# Altium PCB pcb.PcbDoc
Units mm, origin at the board's own origin, x right, y up, seen from the top; angles counter-clockwise.
Board outline 52 x 50 mm, 4 copper layers (Top Layer, MID1, MID2, Bottom Layer), stack 1.579 mm thick; 107 components, 61 nets, 347 pads, 88 vias.
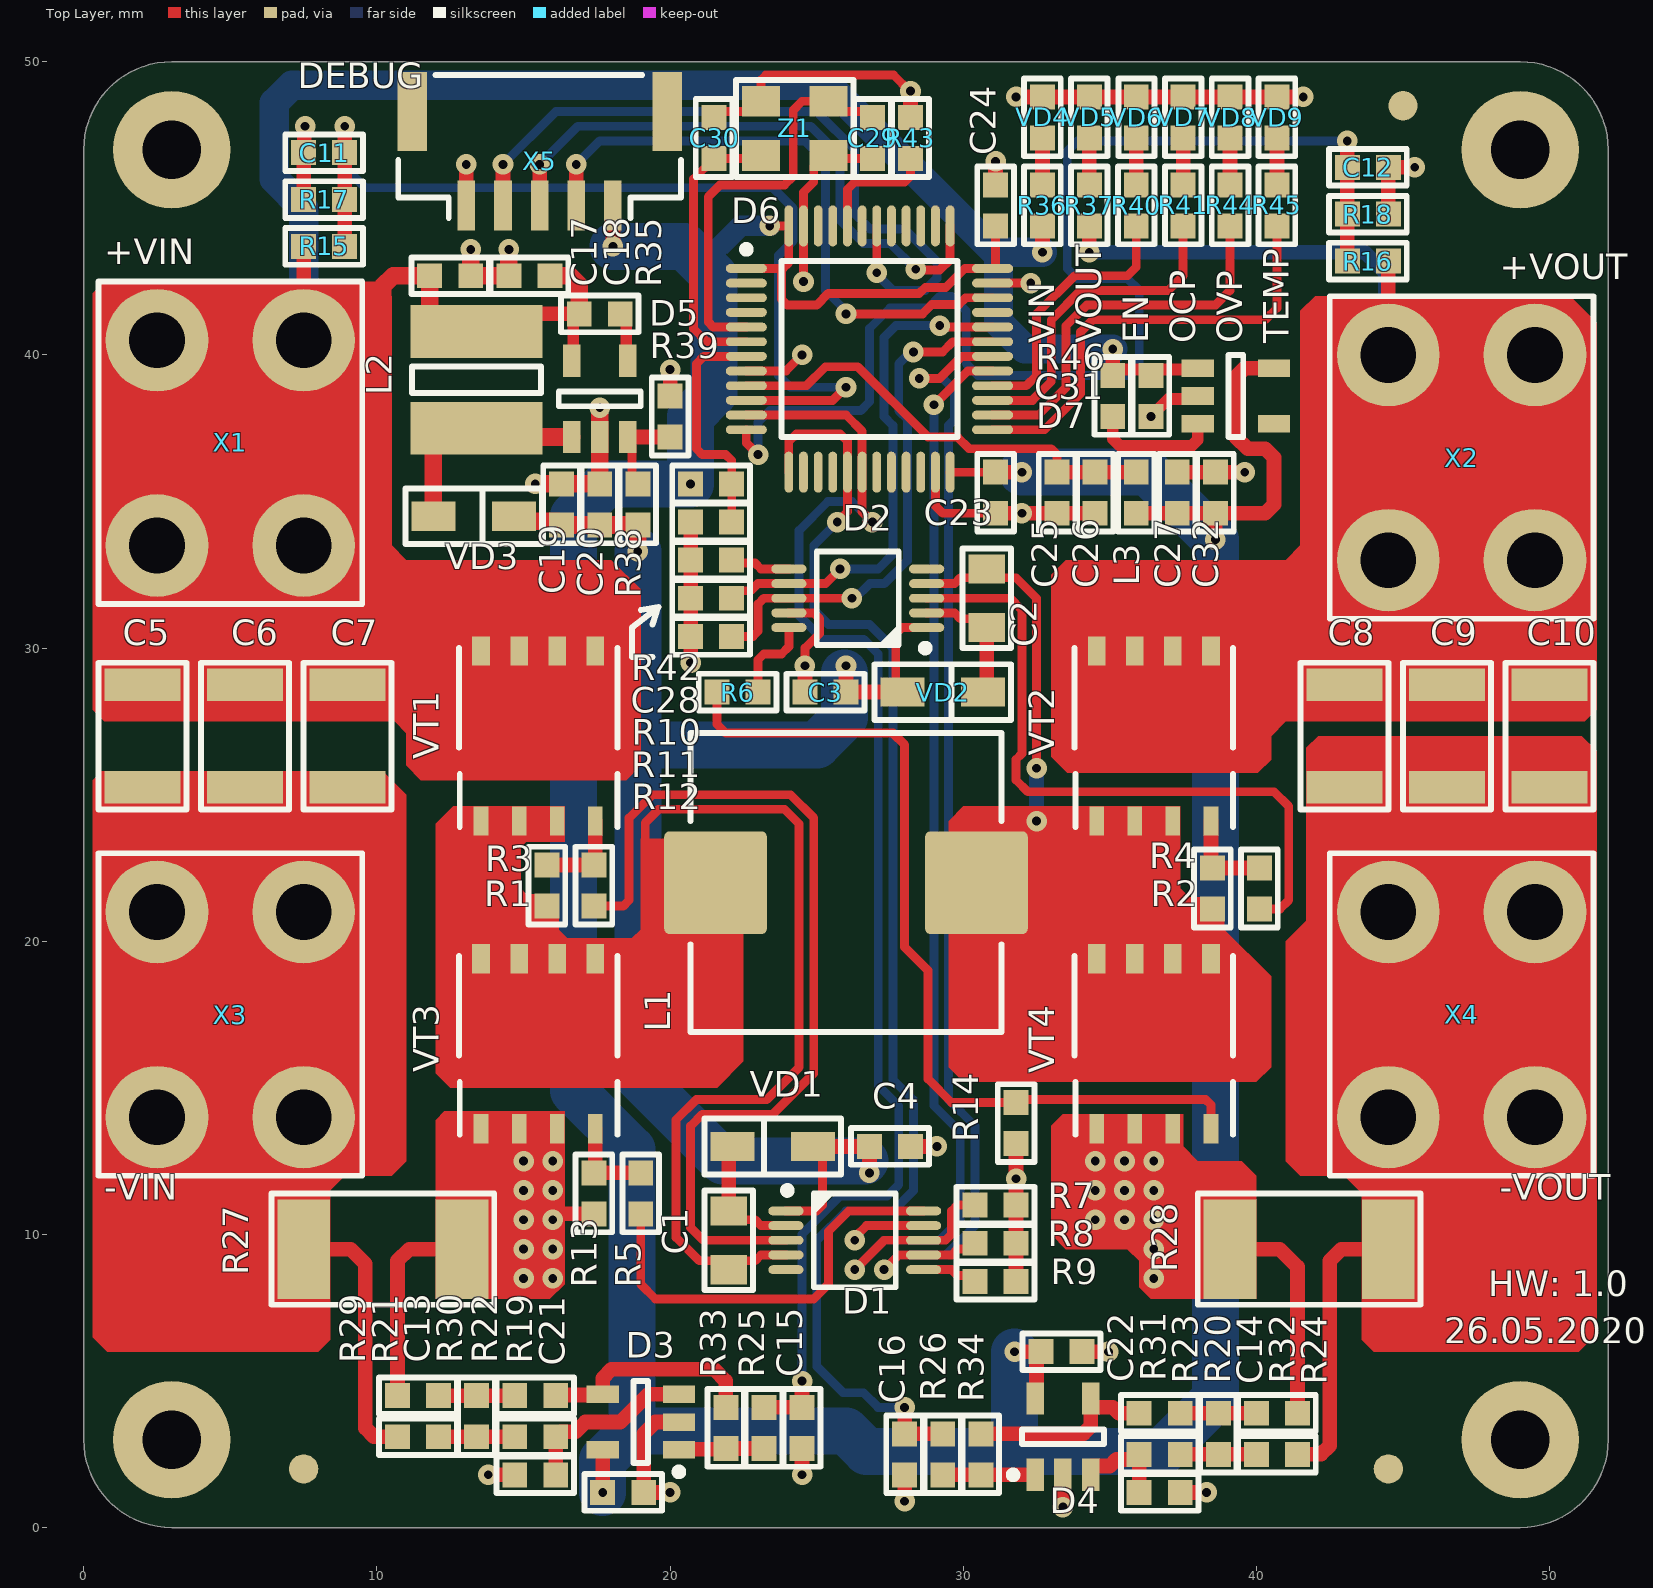
[diagram p0: Top Layer view]
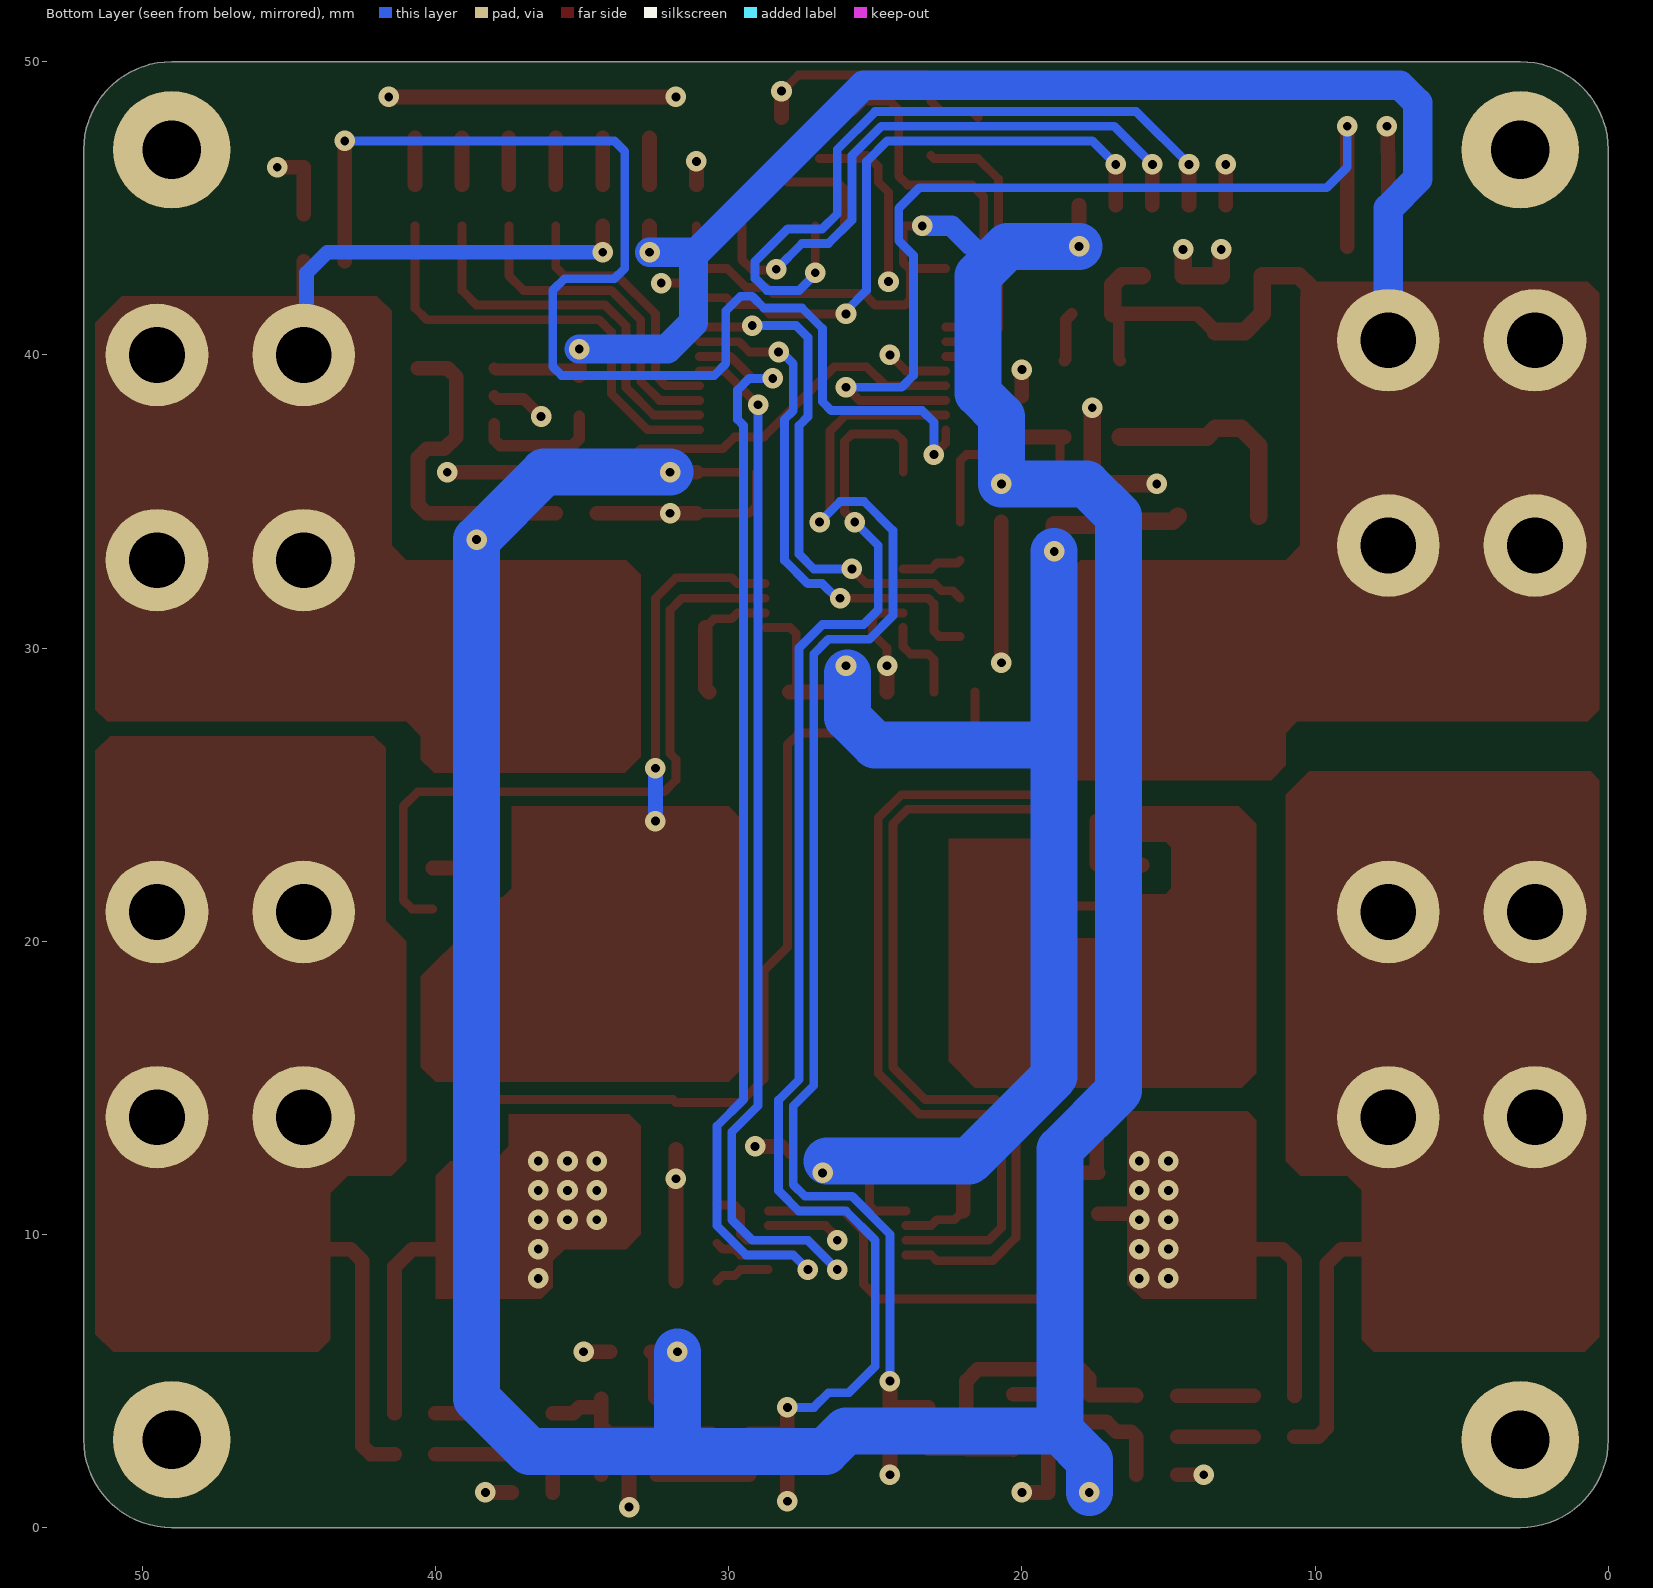
[diagram p1: Bottom Layer view, seen from below]
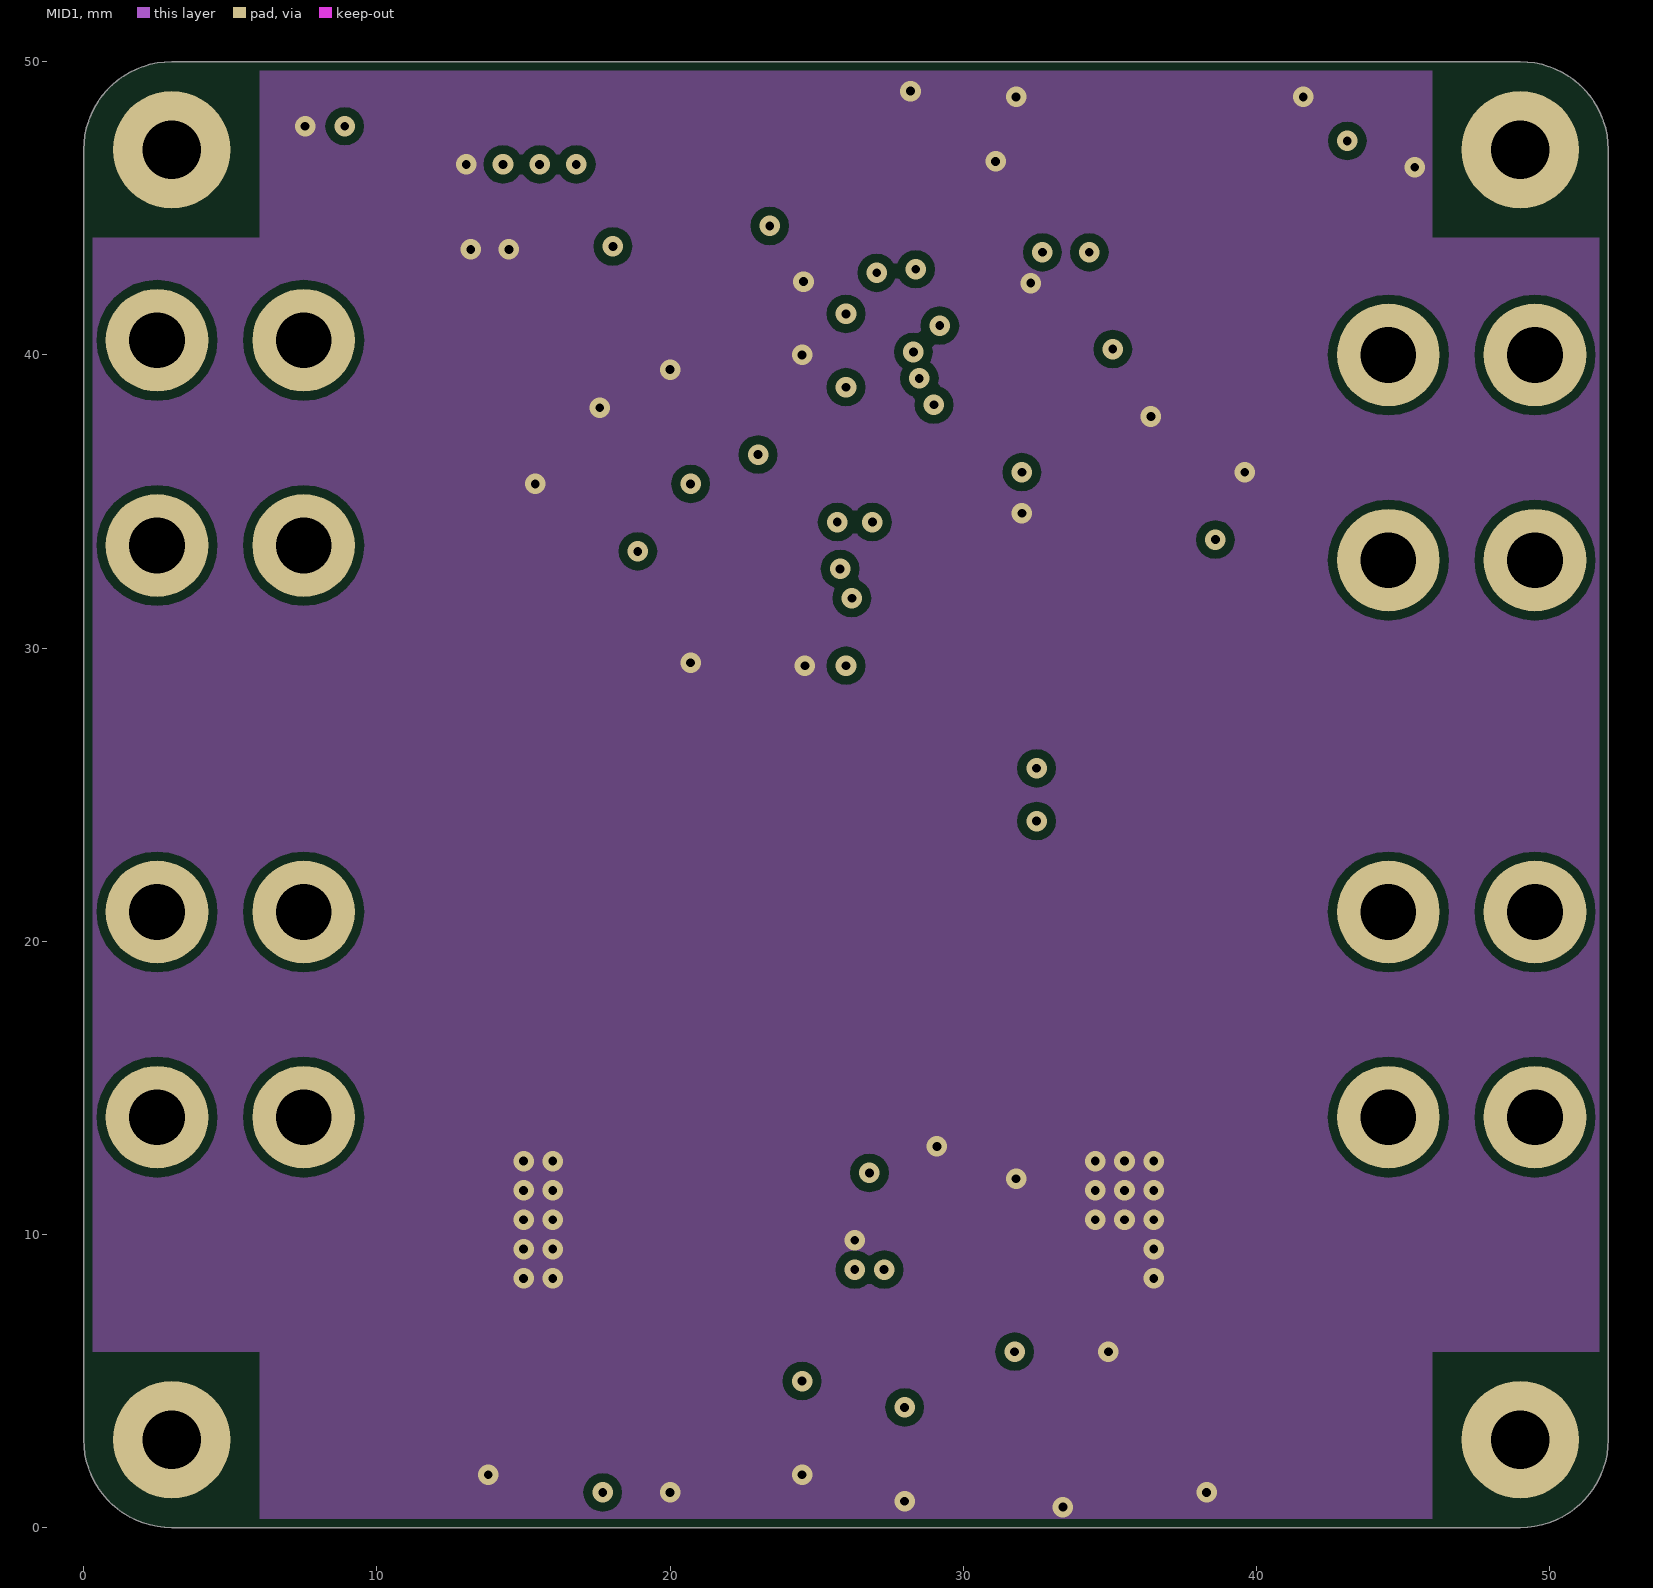
[diagram p2: MID1]
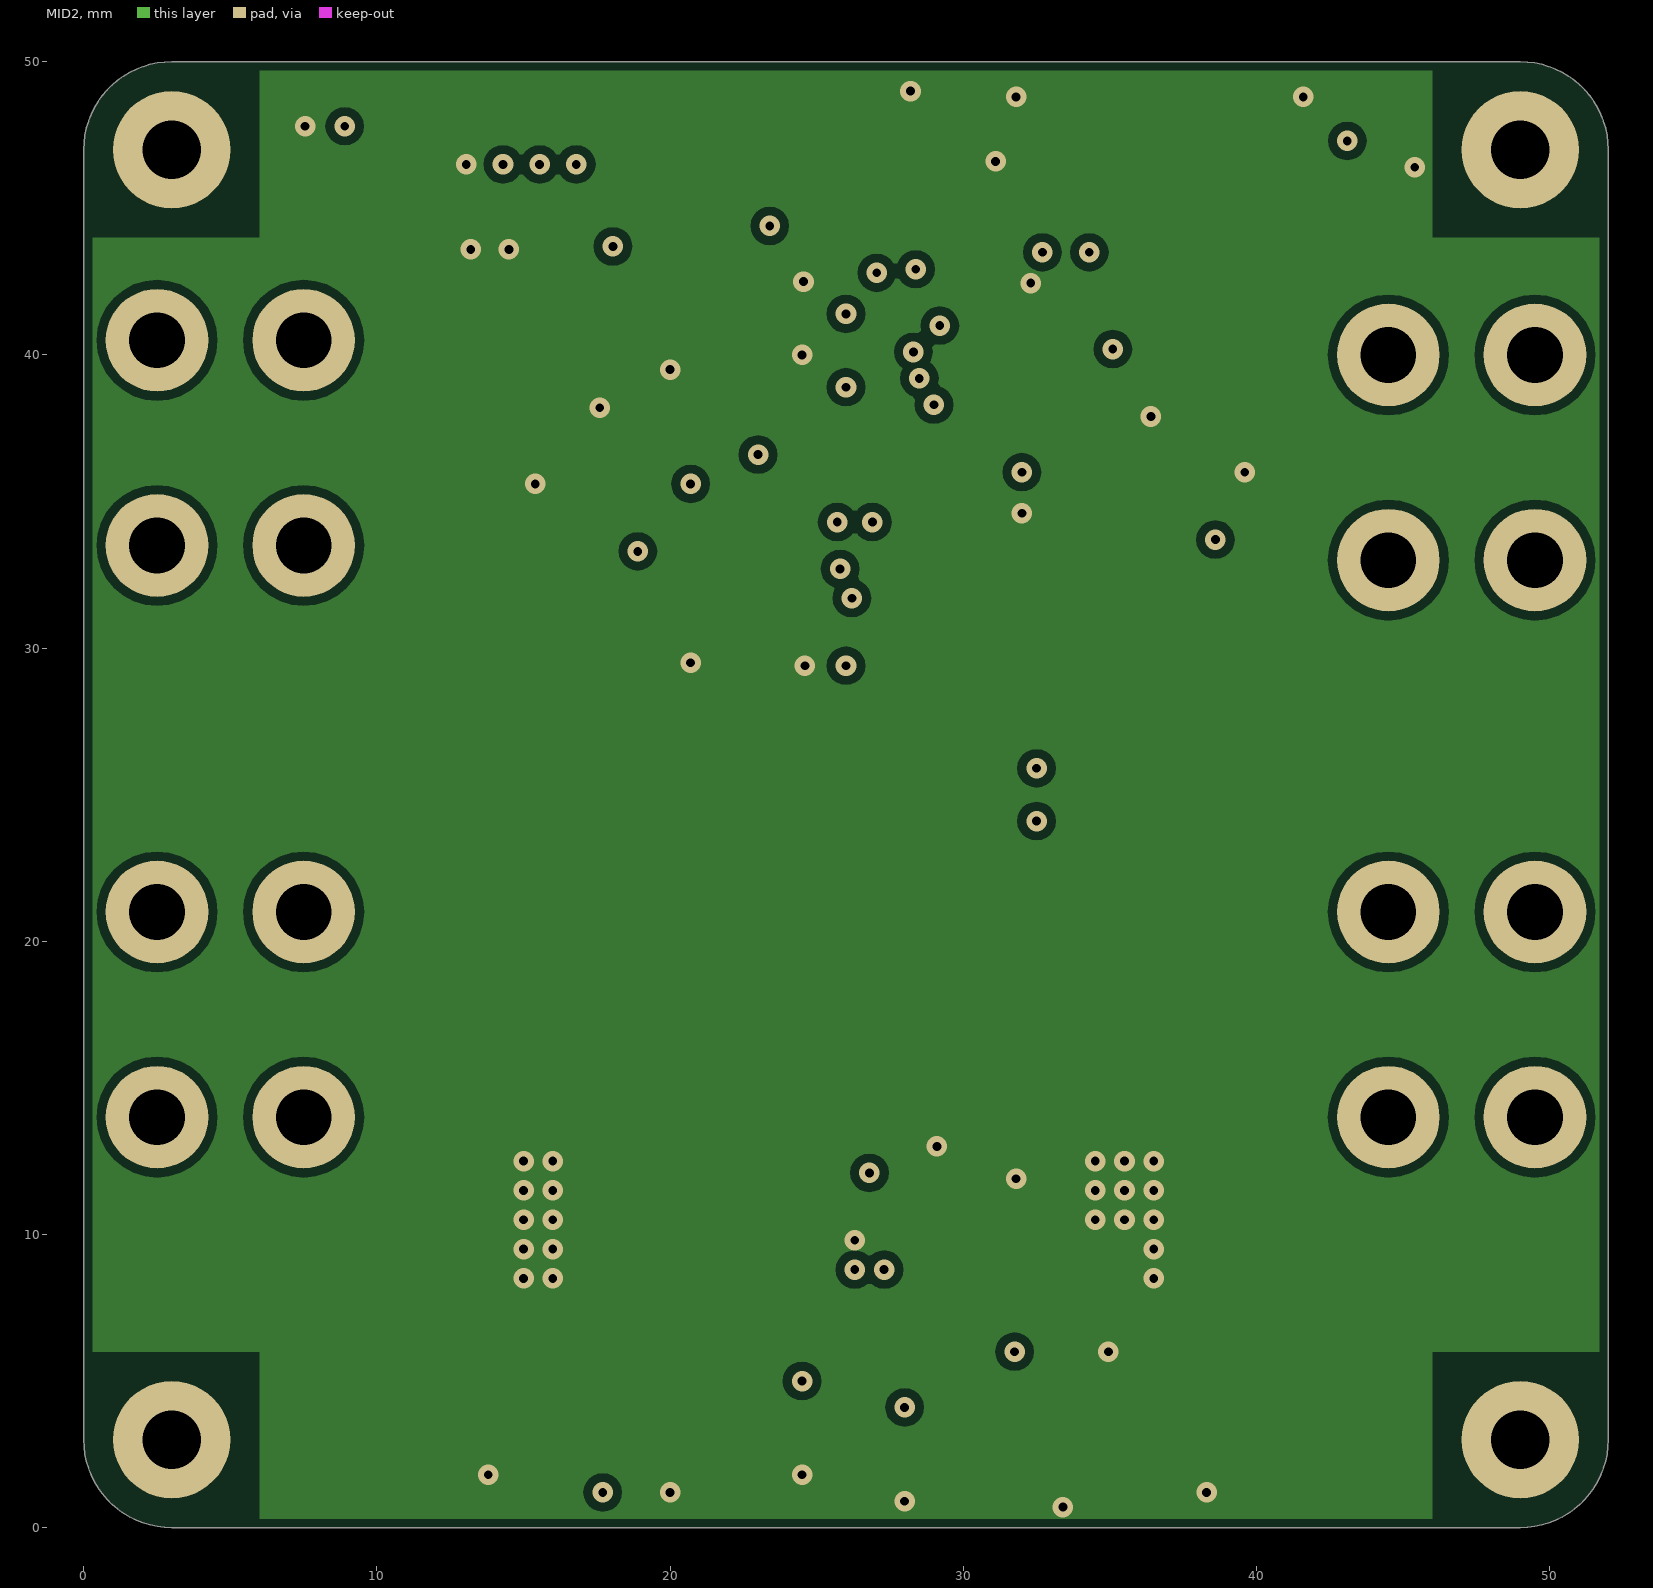
[diagram p3: MID2]
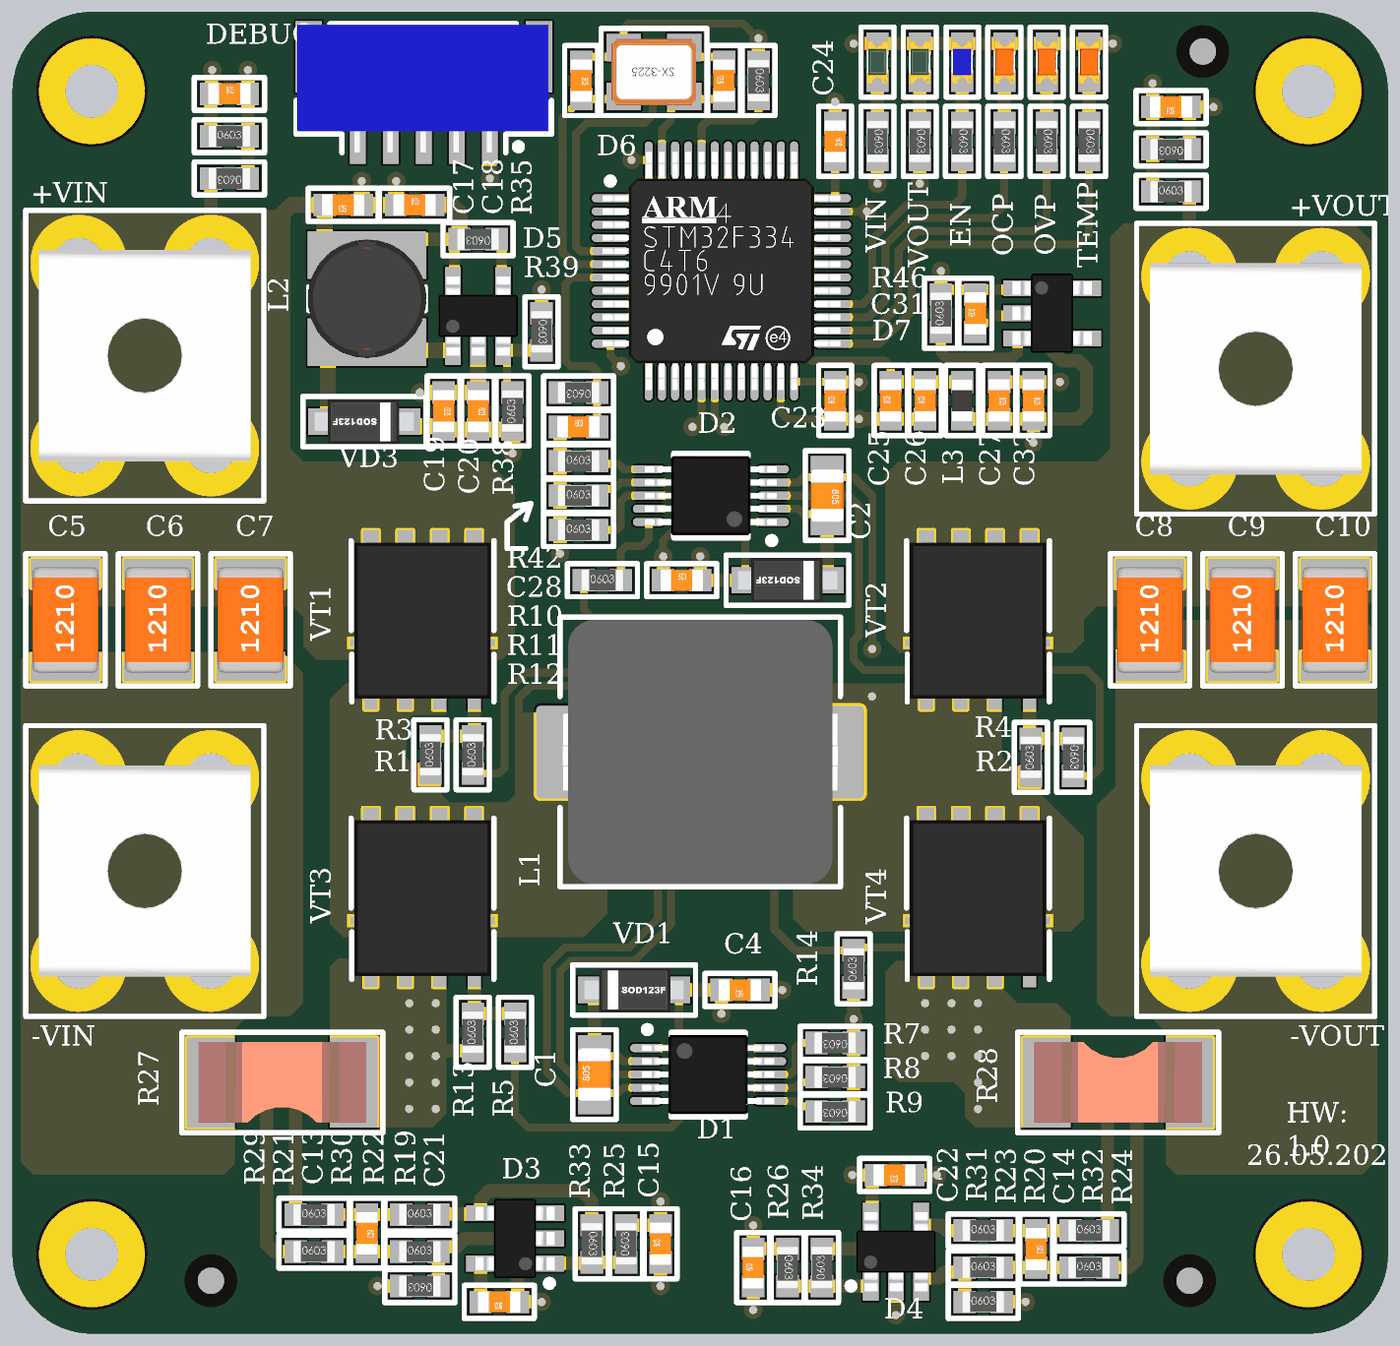
[diagram p4: 3D render of the assembled board from above, using the file's embedded part models]

## Layer stack, top to bottom
Top Solder: solder mask 0.0102, Solder Resist, Dk 3.5
Top Layer: signal copper 0.036
Dielectric 2: prepreg 0.0711, PP-006, Dk 4.1
MID1: signal copper 0.035
Dielectric 1: dielectric 1.295, FR-4, Dk 4.8
MID2: signal copper 0.035
Dielectric 3: prepreg 0.0711, PP-006, Dk 4.1
Bottom Layer: signal copper 0.036
Bottom Solder: solder mask 0.0102, Solder Resist, Dk 3.5

## Board outline
0,3 0,47 cw(c3,47) 3,50 49,50 cw(c49,47) 52,47 52,3 cw(c49,3) 49,0 3,0 cw(c3,3)

## Design rules (kind name [scope] priority, off if disabled: settings)
BoardOutlineClearance [All] p1: gap=0.3 ignorepadtopadclearanceinfootprint=FALSE
Clearance Clearance_MultiLayerPad [OnLayer('Multi-Layer') and IsPad] p1: gap=0.3 ignorepadtopadclearanceinfootprint=FALSE except(0: Arc-Hole Track-Hole SMDPad-Hole THPad-Hole Via-Hole Fill-Hole Poly-Hole Region-Hole Text-Hole)
Clearance Clearance_Polygon [InPolygon] p2: gap=0.2 ignorepadtopadclearanceinfootprint=FALSE except(0: Arc-Hole Track-Hole SMDPad-Hole THPad-Hole Via-Hole Fill-Hole Poly-Hole Region-Hole Text-Hole; 0.3: Arc-Poly Arc-Region Track-Poly Track-Region SMDPad-Poly SMDPad-Region THPad-Poly THPad-Region Via-Poly Via-Region Fill-Poly Fill-Region Poly-Poly Poly-Region Region-Region)
Clearance [All] p3: gap=0.2 ignorepadtopadclearanceinfootprint=FALSE except(0: Arc-Hole Track-Hole SMDPad-Hole THPad-Hole Via-Hole Fill-Hole Poly-Hole Region-Hole Text-Hole)
ComponentClearance [All] p1: gap=0.2 collisioncheckmode=3 verticalgap=0.2 showdistances=FALSE
DiffPairsRouting [All] p1: maxlimit=0.4 minlimit=0.2 mostfreqgap=0.2 toplayer_minwidth=0.2 toplayer_maxwidth=0.3 toplayer_prefwidth=0.2 midlayer1_minwidth=0.2 midlayer1_maxwidth=0.3 midlayer1_prefwidth=0.2 midlayer2_minwidth=0.2 midlayer2_maxwidth=0.3 midlayer2_prefwidth=0.2 bottomlayer_minwidth=0.2 bottomlayer_maxwidth=0.3 bottomlayer_prefwidth=0.2 maxuncoupledlength=12.7
Height [All] p1: minheight=0 maxheight=50 prefheight=12.7
HoleSize [All] p1: absolutevalues=TRUE maxlimit=10 minlimit=0.2 maxpercent=80.000 minpercent=20.000
HoleToHoleClearance [All] p1: gap=0.3 allowstackedmicrovias=TRUE
MinimumSolderMaskSliver [All] p1: minsoldermaskwidth=0.05
PlaneClearance [All] p1: clearance=0.5
PlaneConnect [All] p1: planeconnectstyle=Relief reliefexpansion=0.5 reliefentries=4 reliefconductorwidth=0.5 reliefairgap=0.3
PolygonConnect PolygonConnect_PadGND [InNet('GND') and IsPad] p1: connectstyle=Relief reliefconductorwidth=0.5 reliefentries=4 polygonreliefangle="90 Angle" airgapwidth=0.3
PolygonConnect PolygonConnect_Via [IsVia] p2: connectstyle=Direct reliefconductorwidth=0.254 reliefentries=4 polygonreliefangle="90 Angle" airgapwidth=0.254
PolygonConnect [All] p3: connectstyle=Relief reliefconductorwidth=0.5 reliefentries=4 polygonreliefangle="90 Angle" airgapwidth=0.3
RoutingTopology [All] p1: topology=Vertical
RoutingVias [All] p1: holewidth=0.2 width=0.4 viastyle="Through Hole" minholewidth=0.2 minwidth=0.4 maxholewidth=0.5 maxwidth=1.2
SilkToSilkClearance [All] p1: silktosilkclearance=0.05
SilkToSolderMaskClearance [IsPad] p1: minsilkscreentomaskgap=0.05 clearancetoexposedcopper=TRUE
SolderMaskExpansion [All] p1: expansion=0.075 istentingtop=FALSE
Width [All] p1: maxlimit=10 minlimit=0.2 preferedwidth=0.2
19 further rules are at their usual default settings.

## Classes and differential pairs
component class dsp: C23 C24 C25 C26 C27 C28 C29 C30 C31 C32 D6 D7 L3 R40 R41 R42 R43 R44 R45 R46 VD6 VD7 VD8 VD9 X5 Z1
component class converter: C1 C2 C3 C4 C5 C6 C7 C8 C9 C10 C11 C12 C13 C14 C15 C16 C17 C18 C19 C20 C21 C22 D1 D2 D3 D4 D5 L1 L2 R1 R2 R3 R4 R5 R6 R7 R8 R9 R10 R11 R12 R13 R14 R15 R16 R17 R18 R19 R20 R21 R22 R23 R24 R25 R26 R27 R28 R29 R30 R31 R32 R33 R34 R35 R36 R37 R38 R39 VD1 VD2 VD3 VD4 VD5 VT1 VT2 VT3 VT4 X1 X2 X3 X4

## Components (designator, comment, footprint, x,y, rotation, side; value= is the part's Value field where it differs from the comment)
C1 "Ceramic capacitor, 0.47μF, X7R, ±10%, 25V, 805, -55...+125°C" "CAP: 0805" 22,9.8 r90 top value=0.47μF
C2 "Ceramic capacitor, 0.47μF, X7R, ±10%, 25V, 805, -55...+125°C" "CAP: 0805" 30.8,31.7 r270 top value=0.47μF
C3 "Ceramic capacitor, 1μF, X7R, ±10%, 25V, 603, -55...+125°C" "CAP: 0603" 25.3,28.5 r0 top value=1μF
C4 "Ceramic capacitor, 1μF, X7R, ±10%, 25V, 603, -55...+125°C" "CAP: 0603" 27.5,13 r180 top value=1μF
C5 "Ceramic capacitor, 10μF, X7R, ±10%, 25V, 1210, -55...+125°C" "CAP: 1210" 2,27 r90 top value=10μF
C6 "Ceramic capacitor, 10μF, X7R, ±10%, 25V, 1210, -55...+125°C" "CAP: 1210" 5.5,27 r90 top value=10μF
C7 "Ceramic capacitor, 10μF, X7R, ±10%, 25V, 1210, -55...+125°C" "CAP: 1210" 9,27 r90 top value=10μF
C8 "Ceramic capacitor, 10μF, X7R, ±10%, 25V, 1210, -55...+125°C" "CAP: 1210" 43,27 r90 top value=10μF
C9 "Ceramic capacitor, 10μF, X7R, ±10%, 25V, 1210, -55...+125°C" "CAP: 1210" 46.5,27 r90 top value=10μF
C10 "Ceramic capacitor, 10μF, X7R, ±10%, 25V, 1210, -55...+125°C" "CAP: 1210" 50,27 r90 top value=10μF
C11 "Ceramic capacitor, 0.01μF, X7R, ±10%, 50V, 603, -55...+125°C" "CAP: 0603" 8.2,46.9 r0 top value=0.01μF
C12 "Ceramic capacitor, 0.01μF, X7R, ±10%, 50V, 603, -55...+125°C" "CAP: 0603" 43.8,46.4 r180 top value=0.01μF
C13 "Ceramic capacitor, 470pF, NPO, ±5%, 50V, 603, -55...+125°C" "CAP: 0603" 13.4,3.8 r270 top value=470pF
C14 "Ceramic capacitor, 470pF, NPO, ±5%, 50V, 603, -55...+125°C" "CAP: 0603" 38.7,3.2 r270 top value=470pF
C15 "Ceramic capacitor, 0.01μF, X7R, ±10%, 50V, 603, -55...+125°C" "CAP: 0603" 24.5,3.4 r90 top value=0.01μF
C16 "Ceramic capacitor, 0.01μF, X7R, ±10%, 50V, 603, -55...+125°C" "CAP: 0603" 28,2.5 r90 top value=0.01μF
C17 "Ceramic capacitor, 1μF, X7R, ±10%, 25V, 603, -55...+125°C" "CAP: 0603" 12.5,42.7 r180 top value=1μF
C18 "Ceramic capacitor, 1μF, X7R, ±10%, 25V, 603, -55...+125°C" "CAP: 0603" 15.2,42.7 r0 top value=1μF
C19 "Ceramic capacitor, 1μF, X7R, ±10%, 25V, 603, -55...+125°C" "CAP: 0603" 16.3,34.9 r270 top value=1μF
C20 "Ceramic capacitor, 1μF, X7R, ±10%, 25V, 603, -55...+125°C" "CAP: 0603" 17.6,34.9 r270 top value=1μF
C21 "Ceramic capacitor, 0.1μF, X7R, ±10%, 50V, 603, -55...+125°C" "CAP: 0603" 18.4,1.2 r180 top value=0.1μF
C22 "Ceramic capacitor, 0.1μF, X7R, ±10%, 50V, 603, -55...+125°C" "CAP: 0603" 33.35,6 r180 top value=0.1μF
C23 "Ceramic capacitor, 0.1μF, X7R, ±10%, 50V, 603, -55...+125°C" "CAP: 0603" 31.1,35.3 r90 top value=0.1μF
C24 "Ceramic capacitor, 0.1μF, X7R, ±10%, 50V, 603, -55...+125°C" "CAP: 0603" 31.1,45.1 r270 top value=0.1μF
C25 "Ceramic capacitor, 0.01μF, X7R, ±10%, 50V, 603, -55...+125°C" "CAP: 0603" 33.199,35.3 r90 top value=0.01μF
C26 "Ceramic capacitor, 1μF, X7R, ±10%, 25V, 603, -55...+125°C" "CAP: 0603" 34.5,35.3 r90 top value=1μF
C27 "Ceramic capacitor, 1μF, X7R, ±10%, 25V, 603, -55...+125°C" "CAP: 0603" 37.3,35.3 r270 top value=1μF
C28 "Ceramic capacitor, 0.1μF, X7R, ±10%, 50V, 603, -55...+125°C" "CAP: 0603" 21.4,34.3 r0 top value=0.1μF
C29 "Ceramic capacitor, 12pF, NPO, ±10%, 50V, 603, -55...+125°C" "CAP: 0603" 26.9,47.4 r90 top value=12pF
C30 "Ceramic capacitor, 12pF, NPO, ±10%, 50V, 603, -55...+125°C" "CAP: 0603" 21.5,47.4 r270 top value=12pF
C31 "Ceramic capacitor, 0.1μF, X7R, ±10%, 50V, 603, -55...+125°C" "CAP: 0603" 36.4,38.6 r90 top value=0.1μF
C32 "Ceramic capacitor, 0.1μF, X7R, ±10%, 50V, 603, -55...+125°C" "CAP: 0603" 38.6,35.3 r270 top value=0.1μF
D1 "Half-bridge gate driver, 40V, +1.2A/-1.8A, Complementary, supply 3...21V, -40...+125°C, 10-MSOP" 10-TSSOP 26.299,9.8 r0 top
D2 "Half-bridge gate driver, 40V, +1.2A/-1.8A, Complementary, supply 3...21V, -40...+125°C, 10-MSOP" 10-TSSOP 26.401,31.7 r180 top
D3 "IC op amplifier, Rail-to-Rail, 20 MHz, 2.7...5.5V, -40...+125°C, SOT23-5" SOT23-5 19,3.6 r180 top
D4 "IC op amplifier, Rail-to-Rail, 20 MHz, 2.7...5.5V, -40...+125°C, SOT23-5" SOT23-5 33.4,3.1 r90 top
D5 "DC/DC boost converter, input 2.6...16V, 1.5MHz, output 3...29V, 0.5A, -40...+85°C, SOT23-5" SOT23-5 17.6,38.499 r90 top
D6 "IC microcontroller, 32-Bit, Cortex-M4, 72MHz, 16KB, 12KB, 2...3.6V, -40...+85°C, 48-LQFP" 48-LQFP 26.8,40.2 r0 top locked
D7 "Linear voltage regulator, input 4...24V, 0.5V, output 3.3V, 0.15A, -40...+85°C, SOT23-6" SOT23-5 39.3,38.6 r0 top
L1 "Fixed inductor, 10μH, ±20%, SRP1038C, 8.5A, -40...+125°C" "IND: SRP1038C" 26,22 r180 top value=10μH
L2 "Fixed inductor, 10μH, ±20%, SDR0403, 1.15A, -40...+125°C" "IND: SDR0403" 13.4,37.5 r180 top value=10μH
L3 "Fixed inductor, 10μH, ±20%, 603, 50mA, -55...+125°C" "IND: 0603" 35.9,35.3 r90 top value=10μH
R1 "Resistor film, 10R, ±5%, 603, 0.1W, -55...+125°C" "RES: 0603" 17.4,21.9 r90 top value=10R
R2 "Resistor film, 10R, ±5%, 603, 0.1W, -55...+125°C" "RES: 0603" 40.1,21.8 r270 top value=10R
R3 "Resistor film, 10k, ±5%, 603, 0.1W, -55...+125°C" "RES: 0603" 15.8,21.9 r90 top value=10k
R4 "Resistor film, 10k, ±5%, 603, 0.1W, -55...+125°C" "RES: 0603" 38.5,21.8 r90 top value=10k
R5 "Resistor film, 10R, ±5%, 603, 0.1W, -55...+125°C" "RES: 0603" 19,11.4 r90 top value=10R
R6 "Resistor film, 10R, ±5%, 603, 0.1W, -55...+125°C" "RES: 0603" 22.3,28.5 r0 top value=10R
R7 "Resistor film, 10k, ±5%, 603, 0.1W, -55...+125°C" "RES: 0603" 31.1,11 r180 top value=10k
R8 "Resistor film, 10k, ±5%, 603, 0.1W, -55...+125°C" "RES: 0603" 31.1,9.7 r180 top value=10k
R9 "Resistor film, 10k, ±5%, 603, 0.1W, -55...+125°C" "RES: 0603" 31.1,8.4 r180 top value=10k
R10 "Resistor film, 10k, ±5%, 603, 0.1W, -55...+125°C" "RES: 0603" 21.4,33 r0 top value=10k
R11 "Resistor film, 10k, ±5%, 603, 0.1W, -55...+125°C" "RES: 0603" 21.4,31.7 r0 top value=10k
R12 "Resistor film, 10k, ±5%, 603, 0.1W, -55...+125°C" "RES: 0603" 21.4,30.4 r0 top value=10k
R13 "Resistor film, 10k, ±5%, 603, 0.1W, -55...+125°C" "RES: 0603" 17.4,11.4 r90 top value=10k
R14 "Resistor film, 10k, ±5%, 603, 0.1W, -55...+125°C" "RES: 0603" 31.8,13.8 r90 top value=10k
R15 "Resistor film, 39k, ±1%, 603, 0.1W, -55...+125°C" "RES: 0603" 8.2,43.7 r180 top value=39k
R16 "Resistor film, 39k, ±1%, 603, 0.1W, -55...+125°C" "RES: 0603" 43.8,43.2 r0 top value=39k
R17 "Resistor film, 10k, ±1%, 603, 0.1W, -55...+125°C" "RES: 0603" 8.2,45.3 r0 top value=10k
R18 "Resistor film, 10k, ±1%, 603, 0.1W, -55...+125°C" "RES: 0603" 43.8,44.8 r180 top value=10k
R19 "Resistor film, 20k, ±1%, 603, 0.1W, -55...+125°C" "RES: 0603" 15.4,1.8 r180 top value=20k
R20 "Resistor film, 20k, ±1%, 603, 0.1W, -55...+125°C" "RES: 0603" 36.7,1.2 r0 top value=20k
R21 "Resistor film, 1k, ±1%, 603, 0.1W, -55...+125°C" "RES: 0603" 11.4,3.1 r0 top value=1k
R22 "Resistor film, 1k, ±1%, 603, 0.1W, -55...+125°C" "RES: 0603" 15.4,3.1 r0 top value=1k
R23 "Resistor film, 1k, ±1%, 603, 0.1W, -55...+125°C" "RES: 0603" 36.7,2.5 r0 top value=1k
R24 "Resistor film, 1k, ±1%, 603, 0.1W, -55...+125°C" "RES: 0603" 40.7,2.5 r0 top value=1k
R25 "Resistor film, 120R, ±5%, 603, 0.1W, -55...+125°C" "RES: 0603" 23.2,3.4 r90 top value=120R
R26 "Resistor film, 120R, ±5%, 603, 0.1W, -55...+125°C" "RES: 0603" 29.3,2.5 r270 top value=120R
R27 "Resistor film, 0R05, ±1%, 2512, 3W, -55...+170°C" "RES: CSS2H (2512)" 10.2,9.5 r180 top value=0R05
R28 "Resistor film, 0R05, ±1%, 2512, 3W, -55...+170°C" "RES: CSS2H (2512)" 41.8,9.5 r0 top value=0R05
R29 "Resistor film, 1k, ±1%, 603, 0.1W, -55...+125°C" "RES: 0603" 11.4,4.5 r0 top value=1k
R30 "Resistor film, 1k, ±1%, 603, 0.1W, -55...+125°C" "RES: 0603" 15.4,4.5 r0 top value=1k
R31 "Resistor film, 1k, ±1%, 603, 0.1W, -55...+125°C" "RES: 0603" 36.7,3.9 r0 top value=1k
R32 "Resistor film, 1k, ±1%, 603, 0.1W, -55...+125°C" "RES: 0603" 40.7,3.9 r0 top value=1k
R33 "Resistor film, 20k, ±1%, 603, 0.1W, -55...+125°C" "RES: 0603" 21.9,3.4 r270 top value=20k
R34 "Resistor film, 20k, ±1%, 603, 0.1W, -55...+125°C" "RES: 0603" 30.6,2.5 r90 top value=20k
R35 "Resistor film, 10k, ±5%, 603, 0.1W, -55...+125°C" "RES: 0603" 17.6,41.4 r180 top value=10k
R36 "Resistor film, 1k, ±1%, 603, 0.1W, -55...+125°C" "RES: 0603" 32.7,45.1 r270 top value=1k
R37 "Resistor film, 1k, ±1%, 603, 0.1W, -55...+125°C" "RES: 0603" 34.3,45.1 r270 top value=1k
R38 "Resistor film, 110k, ±1%, 603, 0.1W, -55...+125°C" "RES: 0603" 18.9,34.9 r90 top value=110k
R39 "Resistor film, 10k, ±1%, 603, 0.1W, -55...+125°C" "RES: 0603" 20,37.9 r270 top value=10k
R40 "Resistor film, 1k, ±1%, 603, 0.1W, -55...+125°C" "RES: 0603" 35.9,45.1 r270 top value=1k
R41 "Resistor film, 1k, ±1%, 603, 0.1W, -55...+125°C" "RES: 0603" 37.5,45.1 r270 top value=1k
R42 "Resistor film, 10k, ±5%, 603, 0.1W, -55...+125°C" "RES: 0603" 21.4,35.6 r180 top value=10k
R43 "Resistor film, 10k, ±5%, 603, 0.1W, -55...+125°C" "RES: 0603" 28.2,47.4 r270 top value=10k
R44 "Resistor film, 1k, ±1%, 603, 0.1W, -55...+125°C" "RES: 0603" 39.1,45.1 r270 top value=1k
R45 "Resistor film, 1k, ±1%, 603, 0.1W, -55...+125°C" "RES: 0603" 40.7,45.1 r270 top value=1k
R46 "Resistor film, 10k, ±5%, 603, 0.1W, -55...+125°C" "RES: 0603" 35.1,38.6 r90 top value=10k
VD1 "Schottky diode, 60B160S1F-7, 1A, 650mV, 45pF, SOD-123F, -55...+150°C" "DIODE: SOD123F" 23.5,13 r180 top
VD2 "Schottky diode, 60B160S1F-7, 1A, 650mV, 45pF, SOD-123F, -55...+150°C" "DIODE: SOD123F" 29.3,28.5 r0 top
VD3 "Schottky diode, 60B160S1F-7, 1A, 650mV, 45pF, SOD-123F, -55...+150°C" "DIODE: SOD123F" 13.3,34.5 r0 top
VD4 "LED, 20mA, 2V, 603, -55...+150°C" "LED: 0603G" 32.7,48.1 r90 top
VD5 "LED, 20mA, 2V, 603, -55...+150°C" "LED: 0603G" 34.3,48.1 r90 top
VD6 "LED, 20mA, 3.2V, 603, -55...+150°C" "LED: 0603B" 35.9,48.1 r90 top
VD7 "LED, 20 mA, 2V, 603, -55...+150°C" "LED: 0603R" 37.5,48.1 r90 top
VD8 "LED, 20 mA, 2V, 603, -55...+150°C" "LED: 0603R" 39.1,48.1 r90 top
VD9 "LED, 20 mA, 2V, 603, -55...+150°C" "LED: 0603R" 40.7,48.1 r90 top
VT1 "MOSFET N-channel transistor, 30V, 20A, 17nC, 2.5W, 3.7mOhm, 1100pF, 8-TDSON, -55...+150°C" 8-TDSON 15.5,27 r0 top
VT2 "MOSFET N-channel transistor, 30V, 20A, 17nC, 2.5W, 3.7mOhm, 1100pF, 8-TDSON, -55...+150°C" 8-TDSON 36.5,27 r0 top
VT3 "MOSFET N-channel transistor, 30V, 20A, 17nC, 2.5W, 3.7mOhm, 1100pF, 8-TDSON, -55...+150°C" 8-TDSON 15.5,16.5 r0 top
VT4 "MOSFET N-channel transistor, 30V, 20A, 17nC, 2.5W, 3.7mOhm, 1100pF, 8-TDSON, -55...+150°C" 8-TDSON 36.5,16.5 r0 top
X1 "Power connector, 500V, 15A" "CON: 8191" 5,37 r0 top
X2 "Power connector, 500V, 15A" "CON: 8191" 47,36.5 r0 top
X3 "Power connector, 500V, 15A" "CON: 8191" 5,17.5 r0 top
X4 "Power connector, 500V, 15A" "CON: 8191" 47,17.5 r0 top
X5 "Connector, 5pin, 1.25mm, 50VDC, 1A" "CON: SM05B-GHS" 15.525,49.55 r180 top
Z1 "Crystal, 8MHz, 12pF, ±30ppm, case 3225, -40...+85°C" "OSC: 3225" 24.25,47.725 r180 top

## Footprints (in the part's own frame and the unit in brackets; to place one, negate y for a bottom-side part, rotate by r counter-clockwise, add the part's x,y. Pads: shape width x height; smd on the part's side, far side on the other; paste and mask are expansions set on the pad)
8-TDSON [mm] "pitch 1.3 mm, power pad"
  rect 0.5x1 smd: 1(1.95,-2.9) 3(-1.95,-2.9) 3(-0.65,-2.9) 3(0.65,-2.9)
  rect 0.6x1 smd: 2(-1.95,2.9) 2(-0.65,2.9) 2(0.65,2.9) 2(1.95,2.9)
  round 0.5 on Mech1: ""(2.1,-2.4)
  Top Layer region: -2.25,2.525 -1.65,2.525 -0.95,2.525 -0.35,2.525 0.35,2.525 0.95,2.525 1.65,2.525 2.25,2.525 2.25,-0.725 2.75,-0.725 2.75,-1.025 -2.75,-1.025 -2.75,-0.725 -2.25,-0.725
  Top Layer region: -2.75,-1.025 -2.25,-1.025 -2.25,-1.25 2.25,-1.25 2.25,-1.025 2.75,-1.025 2.75,-1.025 2.75,-0.725 -2.75,-0.725
  silkscreen extent -2.7,-3.1 2.7,3, body extent -2.67,-3.1 2.68,3.05, height 1.03
10-TSSOP [mm] "3x3 mm, pitch 0.5 mm"
  rrect100% 1.2x0.3 smd: 1(-2.35,1) 2(-2.35,0.5) 3(-2.35,0) 4(-2.35,-0.5) 5(-2.35,-1) 6(2.35,-1) 7(2.35,-0.5) 8(2.35,0) 9(2.35,0.5) 10(2.35,1)
  round 0.5 on Mech1: ""(-2.1,1.1)
  silkscreen extent -2.42,-1.6 1.4,1.82, body extent -2.5,-1.5 2.5,1.5, height 1.1
48-LQFP [mm] "QFP, 48-Leads, Body 7x7mm, Pitch 0.5mm, IPC Medium Density"
  oval 1.4x0.3 smd: 1(-4.2,2.75) 2(-4.2,2.25) 3(-4.2,1.75) 4(-4.2,1.25) 5(-4.2,0.75) 6(-4.2,0.25) 7(-4.2,-0.25) 8(-4.2,-0.75) 9(-4.2,-1.25) 10(-4.2,-1.75) 11(-4.2,-2.25) 12(-4.2,-2.75) 25(4.2,-2.75) 26(4.2,-2.25) 27(4.2,-1.75) 28(4.2,-1.25) 29(4.2,-0.75) 30(4.2,-0.25) 31(4.2,0.25) 32(4.2,0.75) 33(4.2,1.25) 34(4.2,1.75) 35(4.2,2.25) 36(4.2,2.75)
  oval 0.3x1.4 smd: 13(-2.75,-4.2) 14(-2.25,-4.2) 15(-1.75,-4.2) 16(-1.25,-4.2) 17(-0.75,-4.2) 18(-0.25,-4.2) 19(0.25,-4.2) 20(0.75,-4.2) 21(1.25,-4.2) 22(1.75,-4.2) 23(2.25,-4.2) 24(2.75,-4.2) 37(2.75,4.2) 38(2.25,4.2) 39(1.75,4.2) 40(1.25,4.2) 41(0.75,4.2) 42(0.25,4.2) 43(-0.25,4.2) 44(-0.75,4.2) 45(-1.25,4.2) 46(-1.75,4.2) 47(-2.25,4.2) 48(-2.75,4.2)
  round 0.5 on Mech1: ""(-4,4)
  silkscreen extent -4.32,-3 3,3.52, body extent -4.5,-4.5 4.5,4.5, height 1.6
"CAP: 0603" [mm]
  rect 0.85x0.85 smd: 1(-0.7,0) 2(0.7,0)
  silkscreen extent -1.33,-0.63 1.33,0.63, body extent -0.8,-0.4 0.8,0.4, height 0.3
"CAP: 0805" [mm]
  rect 1x1.25 smd: 1(-1,0) 2(1,0)
  silkscreen extent -1.7,-0.82 1.7,0.82, body extent -1,-0.62 1,0.63, height 0.78
"CAP: 1210" [mm]
  rect 1.1x2.6 smd: 1(-1.75,0) 2(1.75,0)
  silkscreen extent -2.5,-1.5 2.5,1.5, body extent -2,-1.24 2,1.24, height 1.7
"CON: 8191" [mm]
  round 3.5 hole 1.9: 1(-2.5,-3.5) 1(-2.5,3.5) 1(2.5,-3.5) 1(2.5,3.5)
  silkscreen extent -4.5,-5.5 4.5,5.5, body extent -4,-4 4,4, height 7.05
"CON: SM05B-GHS" [mm]
  rect 1x2.7 smd: 0(-4.375,1.25) 0(4.325,1.25)
  rect 0.6x1.7 smd: 1(-2.525,4.45) 2(-1.275,4.45) 3(-0.025,4.45) 4(1.225,4.45) 5(2.475,4.45)
  round 0.5 on Mech1: ""(-4.3,4.45)
  round 0.5 on Top Overlay: ""(-3.6,4.65)
  silkscreen extent -4.85,0 4.8,4.88, body extent -4.75,0.03 4.75,4.88, height 4.35
"DIODE: SOD123F" [mm]
  rect 1.5x1 smd: 1(-1.375,0) 2(1.375,0)
  silkscreen extent -2.32,-0.95 2.32,0.95, body extent -1.87,-0.85 1.88,0.85, height 1.23
"IND: 0603" [mm]
  rect 0.85x0.85 smd: 1(-0.7,0) 2(0.7,0)
  silkscreen extent -1.33,-0.63 1.33,0.63, body extent -0.8,-0.4 0.8,0.4, height 0.8
"IND: SDR0403" [mm]
  rect 4.5x1.8 smd: 1(0,0) 2(0,-3.3)
  silkscreen extent -2.2,-2.1 2.2,-1.2, body extent -2.25,-3.9 2.25,0.6, height 3.5
"IND: SRP1038C" [mm]
  rrect10% 3.5x3.5 smd mask+0.102: 1(-4.45,0) 2(4.45,0)
  silkscreen extent -5.3,-5.1 5.3,5.1, body extent -5.2,-5 5.2,5, height 3.8
"LED: 0603B" [mm]
  rect 0.85x0.85 smd: 1(-0.7,0) 2(0.7,0)
  silkscreen extent -1.33,-0.63 1.33,0.6, body extent -0.8,-0.4 0.8,0.4, height 0.6
"LED: 0603G" [mm]
  rect 0.85x0.85 smd: 1(-0.7,0) 2(0.7,0)
  silkscreen extent -1.33,-0.63 1.33,0.63, body extent -0.8,-0.4 0.8,0.4, height 0.6
"LED: 0603R" [mm]
  rect 0.85x0.85 smd: 1(-0.7,0) 2(0.7,0)
  silkscreen extent -1.33,-0.63 1.33,0.63, body extent -0.8,-0.4 0.8,0.4, height 0.6
"OSC: 3225" [mm]
  rect 1.3x1.05 smd: 1(-1.15,-0.925) 2(1.15,-0.925) 3(1.15,0.925) 4(-1.15,0.925)
  silkscreen extent -2,-1.65 2,1.65, body extent -1.6,-1.25 1.6,1.25, height 0.81
"RES: 0603" [mm]
  rect 0.85x0.85 smd: 1(-0.7,0) 2(0.7,0)
  silkscreen extent -1.33,-0.63 1.33,0.63, body extent -0.8,-0.4 0.8,0.4, height 0.44
"RES: CSS2H (2512)" [mm]
  rect 1.8x3.4 smd: 1(-2.7,0) 2(2.7,0)
  silkscreen extent -3.8,-1.9 3.8,1.9, body extent -3.18,-1.53 3.18,1.53, height 0.83
SOT23-5 [mm] "pitch 0.95 mm"
  rect 1.1x0.6 smd: 1(-1.3,0.95) 2(-1.3,0) 3(-1.3,-0.95) 4(1.3,-0.95) 5(1.3,0.95)
  round 0.5 on Mech1: ""(-1.1,1.1)
  silkscreen extent -1.43,-1.4 0.25,1.82, body extent -1.5,-1.5 1.5,1.5, height 1.3

## Part data
C1 C2: library part Ceramic_0805, Manufacturer=Samsung, Package=0805, PartNumber=CL21B474KAFNNNG, Temperature=-55...+125°C, Tolerance=±10%, TypeCapacitor="Ceramic capacitor", TypeDielectric=X7R, Voltage=25V, HelpURL=https://www.digikey.com/product-detail/en/samsung-electro-mechanics/CL21B474KAFNNNG/1276-6480-1-ND/5958108, ValueManufacturerPartNumber="Ceramic capacitor, 0.47μF, X7R, ±10%, 25V, 805, -55...+125°C"
C3 C4 C17 C18 C19 C20 C26 C27: library part Ceramic_0603, Manufacturer=Samsung, Package=0603, PartNumber=CL10B105KA8NNNC, Temperature=-55...+125°C, Tolerance=±10%, TypeCapacitor="Ceramic capacitor", TypeDielectric=X7R, Voltage=25V, HelpURL=https://www.digikey.com/product-detail/en/samsung-electro-mechanics/CL10B105KA8NNNC/1276-1184-1-ND/3889270, ValueManufacturerPartNumber="Ceramic capacitor, 1μF, X7R, ±10%, 25V, 603, -55...+125°C"
C5 C6 C7 C8 C9 C10: library part Ceramic_1210, Manufacturer=Samsung, Package=1210, PartNumber=CL32B106KAJNNNE, Temperature=-55...+125°C, Tolerance=±10%, TypeCapacitor="Ceramic capacitor", TypeDielectric=X7R, Voltage=25V, HelpURL=https://www.digikey.com/product-detail/en/samsung-electro-mechanics/CL32B106KAJNNNE/1276-1807-1-ND/3889893, ValueManufacturerPartNumber="Ceramic capacitor, 10μF, X7R, ±10%, 25V, 1210, -55...+125°C"
C11 C12 C15 C16 C25: library part Ceramic_0603, Manufacturer=Yageo, Package=0603, PartNumber=CL10B103KB8NNNC, Temperature=-55...+125°C, Tolerance=±10%, TypeCapacitor="Ceramic capacitor", TypeDielectric=X7R, Voltage=50V, HelpURL=https://www.digikey.com/product-detail/en/samsung-electro-mechanics/CL10B103KB8NNNC/1276-1009-1-ND/3889095, ValueManufacturerPartNumber="Ceramic capacitor, 0.01μF, X7R, ±10%, 50V, 603, -55...+125°C"
C13 C14: library part Ceramic_0603, Manufacturer=Yageo, Package=0603, PartNumber=CL10C471JB8NNNC, Temperature=-55...+125°C, Tolerance=±5%, TypeCapacitor="Ceramic capacitor", TypeDielectric=NPO, Voltage=50V, HelpURL=https://www.digikey.com/product-detail/en/samsung-electro-mechanics/CL10C471JB8NNNC/1276-1168-1-ND/3889254, ValueManufacturerPartNumber="Ceramic capacitor, 470pF, NPO, ±5%, 50V, 603, -55...+125°C"
C21 C22 C23 C24 C28 C31 C32: library part Ceramic_0603, Manufacturer=Yageo, Package=0603, PartNumber=CL10B104KB8WPND, Temperature=-55...+125°C, Tolerance=±10%, TypeCapacitor="Ceramic capacitor", TypeDielectric=X7R, Voltage=50V, HelpURL=https://www.digikey.com/product-detail/en/samsung-electro-mechanics/CL10B104KB8WPND/1276-CL10B104KB8WPNDCT-ND/11488014, ValueManufacturerPartNumber="Ceramic capacitor, 0.1μF, X7R, ±10%, 50V, 603, -55...+125°C"
C29 C30: library part Ceramic_0603, Manufacturer=Samsung, Package=0603, PartNumber=CL10C120JB8NNNC, Temperature=-55...+125°C, Tolerance=±10%, TypeCapacitor="Ceramic capacitor", TypeDielectric=NPO, Voltage=50V, HelpURL=https://www.digikey.com/product-detail/en/samsung-electro-mechanics/CL10C120JB8NNNC/1276-1254-1-ND/3889340, ValueManufacturerPartNumber="Ceramic capacitor, 12pF, NPO, ±10%, 50V, 603, -55...+125°C"
D1 D2: library part FD2105M, "Gate driver", CurrentOutput=+1.2A/-1.8A, Frequency=40V, Manufacturer="Fortior Tech", Package=10-MSOP, Temperature=-40...+125°C, VoltageSupply="supply 3...21V", CMTI=Complementary, ComponentType="Half-bridge gate driver", HelpURL=https://lcsc.com/product-detail/Others_Fortior-Tech-FD2105M_C328452.html, PartNumber=FD2105M, ValueManufacturerPartNumber="Half-bridge gate driver, 40V, +1.2A/-1.8A, Complementary, supply 3...21V, -40...+125°C, 10-MSOP"
D3 D4: library part TSV991ILT, "OP amplifier", Manufacturer=STMicroelectronics, Package=SOT23-5, Temperature=-40...+125°C, ComponentType="IC op amplifier", GainBandwidth="20 MHz", HelpURL=https://www.digikey.com/product-detail/en/stmicroelectronics/TSV991ILT/497-6001-1-ND/1578484, OutputType=Rail-to-Rail, PartNumber=TSV991ILT, Supply=2.7...5.5V, ValueManufacturerPartNumber="IC op amplifier, Rail-to-Rail, 20 MHz, 2.7...5.5V, -40...+125°C, SOT23-5"
D5: library part AP3012KTR-G1, "Boost converter", CurrentOutput=0.5A, Frequency=1.5MHz, Manufacturer="Diodes Incorporated", Package=SOT23-5, Temperature=-40...+85°C, VoltageInput="input 2.6...16V", VoltageOutput="output 3...29V", ComponentType="DC/DC boost converter", HelpURL=https://www.digikey.com/product-detail/en/diodes-incorporated/AP3012KTR-G1/AP3012KTR-G1DICT-ND/4505297, PartNumber=AP3012KTR-G1, ValueManufacturerPartNumber="DC/DC boost converter, input 2.6...16V, 1.5MHz, output 3...29V, 0.5A, -40...+85°C, SOT23-5"
D6: library part STM32F334C4T6, "Cortex-M4", Manufacturer=STMicroelectronics, Package=48-LQFP, Temperature=-40...+85°C, ComponentType="IC microcontroller", CoreProcessor=Cortex-M4, CoreSize=32-Bit, HelpURL=https://www.digikey.com/products/en?keywords=STM32F334C4T6, MemoryRAM=12KB, MemoryROM=16KB, PartNumber=STM32F334C4T6, Speed=72MHz, Supply=2...3.6V, ValueManufacturerPartNumber="IC microcontroller, 32-Bit, Cortex-M4, 72MHz, 16KB, 12KB, 2...3.6V, -40...+85°C, 48-LQFP"
D7: library part AP2204K-3.3TRG1, "Linear voltage regulator", CurrentOutput=0.15A, Manufacturer="Diodes Incorporated", Package=SOT23-6, Temperature=-40...+85°C, VoltageInput="input 4...24V", VoltageOutput="output 3.3V", ComponentType="Linear voltage regulator", HelpURL=https://www.digikey.com/product-detail/en/diodes-incorporated/AP2204K-3.3TRG1/AP2204K-3.3TRG1DICT-ND/4505288, MaxDropout=0.5V, PartNumber=AP2204K-3.3TRG1, ValueManufacturerPartNumber="Linear voltage regulator, input 4...24V, 0.5V, output 3.3V, 0.15A, -40...+85°C, SOT23-6"
L1: library part Inductor_SRP1038C, Manufacturer=Bourns, MaxCurrent=8.5A, Package=SRP1038C, PartNumber=SRP1038C-100M, Temperature=-40...+125°C, Tolerance=±20%, TypeInductor="Fixed inductor", HelpURL=https://www.digikey.com/product-detail/en/bourns-inc/SRP1038C-100M/SRP1038C-100MCT-ND/10249149, ValueManufacturerPartNumber="Fixed inductor, 10μH, ±20%, SRP1038C, 8.5A, -40...+125°C"
L2: library part Inductor_SDR0403, Manufacturer=Bourns, MaxCurrent=1.15A, Package=SDR0403, PartNumber=SDR0403-100ML, Temperature=-40...+125°C, Tolerance=±20%, TypeInductor="Fixed inductor", HelpURL=https://www.digikey.com/product-detail/en/bourns-inc/SDR0403-100ML/SDR0403-100MLCT-ND/2127080, ValueManufacturerPartNumber="Fixed inductor, 10μH, ±20%, SDR0403, 1.15A, -40...+125°C"
L3: library part Inductor_0603, Manufacturer="Murata Electronics", MaxCurrent=50mA, Package=0603, PartNumber=LQM18FN100M00D, Temperature=-55...+125°C, Tolerance=±20%, TypeInductor="Fixed inductor", HelpURL=https://www.digikey.com/product-detail/en/murata-electronics-north-america/LQM18FN100M00D/490-4025-1-ND/1016285, ValueManufacturerPartNumber="Fixed inductor, 10μH, ±20%, 603, 50mA, -55...+125°C"
R1 R2 R5 R6: library part Resistor_0603, Manufacturer=Yageo, Package=0603, PartNumber=RC0603JR-0710RL, Power=0.1W, Temperature=-55...+125°C, Tolerance=±5%, TypeResistor="Resistor film", HelpURL=https://www.digikey.com/product-detail/en/yageo/RC0603JR-0710RL/311-10GRCT-ND/729646, ValueManufacturerPartNumber="Resistor film, 10R, ±5%, 603, 0.1W, -55...+125°C"
R3 R4 R7 R8 R9 R10 R11 R12 R13 R14 R35 R42 R43 R46: library part Resistor_0603, Manufacturer=Yageo, Package=0603, PartNumber=RC0603JR-0710KL, Power=0.1W, Temperature=-55...+125°C, Tolerance=±5%, TypeResistor="Resistor film", HelpURL=https://www.digikey.com/product-detail/en/yageo/RC0603JR-0710KL/311-10KGRCT-ND/729647, ValueManufacturerPartNumber="Resistor film, 10k, ±5%, 603, 0.1W, -55...+125°C"
R15 R16: library part Resistor_0603, Manufacturer=Yageo, Package=0603, PartNumber=RC0603FR-0739KL, Power=0.1W, Temperature=-55...+125°C, Tolerance=±1%, TypeResistor="Resistor film", HelpURL=https://www.digikey.com/product-detail/en/yageo/RC0603FR-0739KL/311-39-0KHRCT-ND/730142, ValueManufacturerPartNumber="Resistor film, 39k, ±1%, 603, 0.1W, -55...+125°C"
R17 R18 R39: library part Resistor_0603, Manufacturer=Yageo, Package=0603, PartNumber=RC0603FR-0710KL, Power=0.1W, Temperature=-55...+125°C, Tolerance=±1%, TypeResistor="Resistor film", HelpURL=https://www.digikey.com/product-detail/en/yageo/RC0603FR-0710KL/311-10-0KHRCT-ND/729827, ValueManufacturerPartNumber="Resistor film, 10k, ±1%, 603, 0.1W, -55...+125°C"
R19 R20 R33 R34: library part Resistor_0603, Manufacturer=Yageo, Package=0603, PartNumber=RC0603FR-0720KL, Power=0.1W, Temperature=-55...+125°C, Tolerance=±1%, TypeResistor="Resistor film", HelpURL=https://www.digikey.com/product-detail/en/yageo/RC0603FR-0720KL/311-20-0KHRCT-ND/729987, ValueManufacturerPartNumber="Resistor film, 20k, ±1%, 603, 0.1W, -55...+125°C"
R21 R22 R23 R24 R29 R30 R31 R32 R36 R37 R40 R41 R44 R45: library part Resistor_0603, Manufacturer=Yageo, Package=0603, PartNumber=RC0603FR-071KL, Power=0.1W, Temperature=-55...+125°C, Tolerance=±1%, TypeResistor="Resistor film", HelpURL=https://www.digikey.com/product-detail/en/yageo/RC0603FR-071KL/311-1-00KHRCT-ND/729790, ValueManufacturerPartNumber="Resistor film, 1k, ±1%, 603, 0.1W, -55...+125°C"
R25 R26: library part Resistor_0603, Manufacturer=Yageo, Package=0603, PartNumber=RC0603JR-07120RL, Power=0.1W, Temperature=-55...+125°C, Tolerance=±5%, TypeResistor="Resistor film", HelpURL=https://www.digikey.com/product-detail/en/yageo/RC0603JR-07120RL/311-120GRCT-ND/729653, ValueManufacturerPartNumber="Resistor film, 120R, ±5%, 603, 0.1W, -55...+125°C"
R27 R28: library part Shunt, Manufacturer=Bourns, Package=2512, PartNumber=CRA2512-FZ-R050ELF, Power=3W, Temperature=-55...+170°C, Tolerance=±1%, TypeResistor="Resistor film", HelpURL=https://www.digikey.com/product-detail/en/bourns-inc/CRA2512-FZ-R050ELF/CRA2512-FZ-R050ELFCT-ND/1775057, ValueManufacturerPartNumber="Resistor film, 0R05, ±1%, 2512, 3W, -55...+170°C"
R38: library part Resistor_0603, Manufacturer=Yageo, Package=0603, PartNumber=RC0603FR-07110KL, Power=0.1W, Temperature=-55...+125°C, Tolerance=±1%, TypeResistor="Resistor film", HelpURL=https://www.digikey.com/product-detail/en/yageo/RC0603FR-07110KL/311-110KHRCT-ND/729852, ValueManufacturerPartNumber="Resistor film, 110k, ±1%, 603, 0.1W, -55...+125°C"
VD1 VD2 VD3: library part Schottky_single, Current=1A, Manufacturer="Diodes Incorporated", Package=SOD-123F, PartNumber=B160S1F-7, Temperature=-55...+150°C, Voltage=60B160S1F-7, VoltageDrop=650mV, HelpURL=https://www.digikey.com/product-detail/en/diodes-incorporated/B160S1F-7/B160S1F-7DICT-ND/7784161, RecoveryTime=45pF, TypeDiode="Schottky diode", ValueManufacturerPartNumber="Schottky diode, 60B160S1F-7, 1A, 650mV, 45pF, SOD-123F, -55...+150°C"
VD4 VD5: library part LED_single, Color=GREEN, Current=20mA, Manufacturer=Wurth, Package=0603, PartNumber=150060VS75000, Temperature=-55...+150°C, VoltageDrop=2V, HelpURL=https://www.digikey.com/product-detail/en/w-rth-elektronik/150060VS75000/732-4980-1-ND/4489904, TypeDiode=LED, ValueManufacturerPartNumber="LED, 20mA, 2V, 603, -55...+150°C"
VD6: library part LED_single, Color=BLUE, Current=20mA, Manufacturer=Wurth, Package=0603, PartNumber=150060BS75000, Temperature=-55...+150°C, VoltageDrop=3.2V, HelpURL=https://www.digikey.com/product-detail/en/w-rth-elektronik/150060BS75000/732-4966-1-ND/4489893, TypeDiode=LED, ValueManufacturerPartNumber="LED, 20mA, 3.2V, 603, -55...+150°C"
VD7 VD8 VD9: library part LED_single, Color=RED, Current="20 mA", Manufacturer=Wurth, Package=0603, PartNumber=150060RS75000, Temperature=-55...+150°C, VoltageDrop=2V, HelpURL=https://www.digikey.com/product-detail/en/w-rth-elektronik/150060RS75000/732-4978-1-ND/4489899, TypeDiode=LED, ValueManufacturerPartNumber="LED, 20 mA, 2V, 603, -55...+150°C"
VT1 VT2 VT3 VT4: library part MOSFET_N_123, CurrentDS=20A, InputCapacitor=1100pF, Manufacturer="Infineon Technologies", MaxPower=2.5W, Package=8-TDSON, PartNumber=BSC0904NSIATMA1, Temperature=-55...+150°C, VoltageDS=30V, GateCharge=17nC, HelpURL=https://www.digikey.com/product-detail/en/infineon-technologies/BSC0904NSIATMA1/BSC0904NSIATMA1CT-ND/3196475, RDS=3.7mOhm, TypeTransistor="MOSFET N-channel transistor", ValueManufacturerPartNumber="MOSFET N-channel transistor, 30V, 20A, 17nC, 2.5W, 3.7mOhm, 1100pF, 8-TDSON, -55...+150°C"
X1 X2 X3 X4: library part Connector_single_power, CurrentMax=15A, Manufacturer=Keystone, PartNumber=8191, VoltageMax=500V, HelpURL=https://ru.mouser.com/ProductDetail/Keystone-Electronics/8191?qs=lQmX4aIt5iAMQ8PQTpZ%2Fwg%3D%3D, TypeConnector="Power connector", ValueManufacturerPartNumber="Power connector, 500V, 15A"
  X1 X3: CommentText="\"Вход\""
  X2 X4: CommentText="\"Выход\""
X5: library part Connector_SM05B, CurrentMax=1A, Manufacturer=JST, PartNumber=SM05B-GHS, VoltageMax=50VDC, CommentText="\"Разъем\"", HelpURL=https://www.digikey.com/product-detail/en/jst-sales-america-inc/SM05B-GHS-TB-LF-SN/455-1567-1-ND/807835, Multichannel=5pin, Pitch=1.25mm, TypeConnector=Connector, ValueManufacturerPartNumber="Connector, 5pin, 1.25mm, 50VDC, 1A"
Z1: library part Crystal_3225, Frequency=8MHz, LoadCapacitance=12pF, Manufacturer=ECS, Package="case 3225", PartNumber=ECS-80-12-33-JGN-TR, Temperature=-40...+85°C, Tolerance=±30ppm, HelpURL=https://www.digikey.com/product-detail/en/ecs-inc/ECS-80-12-33-JGN-TR/50-ECS-80-12-33-JGN-CT-ND/10478769, TypeOscilator=Crystal, ValueManufacturerPartNumber="Crystal, 8MHz, 12pF, ±30ppm, case 3225, -40...+85°C"

## Free pads (board coordinates)
  round 1 smd mask+0.5: ASM(7.5,2) ASM(44.5,2) ASM(45,48.5)
  round 4 hole 2 mask+0.102: MH(3,3) MH(3,47) MH(49,3) MH(49,47)

## Via types
v1: diameter 0.7, hole 0.3, Top Layer to Bottom Layer, tented both sides, 88 vias

## Nets (pads, with @x,y where several pads share a name; then routed paths per layer and width w, separated by ;. In a path a pad name is that pad's centre, name@x,y a point inside that pad or via, vN(x,y) a via of type N, cw(c..) or ccw(c..) an arc to the next point about the centre after c; other vN are vias at no path point)
+3.3V: C21.2 C22.2 C23.2 C24.2 C27.2 C32.2 D3.5 D4.5 D6.1 D6.24 D6.36 D6.48 D7.5 L3.1 R42.2 X5.1 | length 147.3
  Top Layer w0.3: D6.1 23.85,42.95 ; v1(23.4,44.4) D6.48 24.05,43.15 23.85,42.95 ; D6.24 C23.2 ; C24.2 31.1,42.95 D6.36 30.05,42.95 29.4,42.3 28.7,42.3 28.5,42.1 25.4,42.1 25,41.7 24,41.7 23.8,41.9 23.8,42.9 23.85,42.95
  Top Layer w0.5: v1(17.7,1.2) D3.5 ; v1(18.05,43.7) X5.1 ; C23.2 v1(32,36) ; v1(31.75,6) C22.2 32.5,5.85 32.5,4.45 D4.5 ; L3.1@35.9,34.6 C27.2 C32.2 ; v1(38.6,33.7) C32.2 ; D7.5 39.593,39.55 39.3,39.257 39.3,37.2 39.7,36.8 40.3,36.8 40.6,36.5 40.6,34.9 40.3,34.6 C32.2
  Bottom Layer w0.7: 21.7,43.7 22.4,44.4 v1(23.4,44.4)
  Bottom Layer w1.6: v1(17.7,1.2) 17.7,2.3 18.7,3.3 ; v1(18.05,43.7) 20.5,43.7 21.5,42.7 21.5,38.7 20.7,37.9 v1(20.7,35.6) 17.8,35.6 16.7,34.5 16.7,14.9 18.7,12.9 18.7,3.3 ; 31.75,2.9 v1(31.75,6) ; v1(32,36) 36.3,36 v1(38.6,33.7) 38.6,4.4 36.8,2.6 26.7,2.6 26,3.3 18.7,3.3
+15V: C3.2 C4.2 C19.2 C20.2 D1.1 D2.1 R38.1 VD1.1 VD2.1 VD3.2 | length 53.1
  Top Layer w0.3: D1.1 25,10.8 25.2,11 25.2,12.675 VD1.1@25.038,12.838 ; VD2.1 27.7,28.725 27.7,30.5 27.9,30.7 D2.1
  Top Layer w0.5: VD1.1@25.038,12.838 25.2,13 C4.2 v1(26.8,12.1) ; v1(26,29.4) C3.2 VD2.1
  Top Layer w0.6: VD3.2 14.85,34.325 16.175,34.325 C19.2 C20.2 R38.1 v1(18.9,33.3)
  Bottom Layer w1.6: v1(18.9,33.3) 18.9,26.7 ; v1@25.95,29.15 25.95,27.637 25.013,26.7 18.9,26.7 ; 26.65,12.5 21.8,12.5 18.9,15.4 18.9,26.7
+VIN: C5.2 C6.2 C7.2 C17.2 C18.2 C31.2 D5.5 D7.1 L2.2 R15.2 R35.2 R36.2 R46.2 VT1.2 X1.1 | length 65
  Top Layer w0.4: D5.5 16.7,39.849 16.7,41.2 R35.2 ; R46.2 35.3,39.5 37.95,39.5 D7.1
  Top Layer w0.5: X1.1@7.45,40.55 7.5,40.5 R15.2 R15.2@7.55,43.65 ; L2.2 14,41.4 R35.2 ; v1(32.7,43.5) R36.2 ; R46.2 v1(35.1,40.2)
  Top Layer w0.6: 10.2,41.9 10.2,42.35 10.55,42.7 C17.2 11.8,41.4 12.4,40.8 L2.2 ; C18.2 16.6,42.7 16.9,42.4 R35.2
  Bottom Layer w1: X1.1@7.5,40.5 7.5,45 6.5,46 6.5,48.6 7.1,49.2 25.4,49.2 31.2,43.4 ; v1(32.7,43.5) 31.3,43.5 31.2,43.4 ; v1(35.1,40.2) 32.1,40.2 31.2,41.1 31.2,43.4
+VOUT: C8.2 C9.2 C10.2 R16.2 R37.2 VT2.2 X2.1 | length 17.3
  Top Layer w0.5: v1(34.3,43.5) R37.2 ; X2.1@44.5,40 R16.2
  Bottom Layer w0.5: v1(34.3,43.5) 43.7,43.5 44.4,42.8 44.4,40.1 X2.1@44.5,40
GND: C3.1 C4.1 C11.1 C12.1 C15.1 C16.1 C17.1 C18.1 C19.1 C20.1 C21.1 C22.1 C23.1 C24.1 C25.1 C26.1 C27.1 C28.1 C29.1 C30.1 C31.1 C32.1 D1.9 D2.9 D3.2 D4.2 D5.2 D6.8 D6.23 D6.35 D6.47 D7.2 R7.1 R8.1 R9.1 R10.1 R11.1 R12.1 R13.1 R14.1 R17.1 R18.1 R19.2 R20.2 R27.1 R28.1 R29.1 R32.2 R39.1 R43.1 VD4.2 VD5.2 VD6.2 VD7.2 VD8.2 VD9.2 VT3.3 VT4.3 X5.5 Z1.2 Z1.4 | length 98.3
  Top Layer w0.3: C30.1 21.7,48.3 22.75,48.3 Z1.2 23.1,49.374 23.276,49.55 27.619,49.55 28.169,49 v1(28.2,49) ; D6.8 23.95,39.45 v1(24.5,40) ; D2.9 24.9,31.2 25.1,31 25.1,30.5 24.6,30 v1(24.6,29.4) ; v1(24.55,42.5) D6.47 24.55,45.55 24.9,45.9 24.9,46.425 25.275,46.8 Z1.4 25.5,46.7 C29.1 ; v1(26.3,9.8) 26.3,9.9 26.7,10.3 D1.9 ; C4.1@27.925,12.725 C4.1 ; D6.23 29.05,34.85 29.3,34.6 C23.1 ; D6.35 v1(32.3,42.45)
  Top Layer w0.4: v1(36.4,37.9) 37,38.5 37.9,38.5 D7.2
  Top Layer w0.5: R17.1 C11.1 7.525,46.925 7.525,47.775 v1(7.55,47.8) ; R29.1 10.7,9.1 11.1,9.5 R27.1 ; X5.5 v1(13.05,46.5) ; v1(13.8,1.8) R19.2 ; v1@15.8,10.6 15.9,10.7 R13.1 ; v1(20,1.2) C21.1 19.1,3.207 19.493,3.6 D3.2 ; R39.1 v1(20,39.5) ; v1(20.7,29.5) R12.1 R11.1 R10.1 C28.1 ; v1(24.5,1.8) C15.1 ; C3.1 v1(24.6,29.4) ; v1(28,0.9) C16.1 ; C4.1 v1(29.1,13) ; R43.1 v1(28.2,49) ; C23.1 v1(32,34.6) C26.1 ; C24.1 v1(31.1,46.6) ; R9.1 R8.1 R7.1 v1(31.8,11.9) ; v1(31.8,11.9) R14.1@31.8,12.9 ; v1(31.8,48.8) VD4.2 VD5.2 VD6.2 VD7.2 VD8.2 VD9.2 v1(41.6,48.8) ; v1(33.4,0.7) D4.2 ; C22.1 v1(34.95,6) ; C27.1 v1(39.6,36) ; R20.2 v1(38.3,1.2) ; R28.1 40.8,9.5 41.4,8.9 R32.2 ; R18.1 C12.1 v1(45.4,46.4)
  Top Layer w0.6: v1(13.2,43.6) C17.1 C18.1 v1(14.5,43.6) ; v1(15.4,35.6) C19.1 C20.1 D5.2@17.6,36.949 ; D5.2@17.6,36.949 D5.2 v1(17.6,38.2)
  other v1: 15,8.5 16,8.5 36.5,8.5 15,9.5 16,9.5 36.5,9.5 15,10.5 16,10.5 34.5,10.5 35.5,10.5 36.5,10.5 15,11.5 16,11.5 34.5,11.5 35.5,11.5 36.5,11.5 15,12.5 16,12.5 34.5,12.5 35.5,12.5 36.5,12.5
LED0: D6.28 R40.2 | length 9.2
  Top Layer w0.3: D6.28 32.15,38.95 32.5,39.3 32.5,41.4 33.8,42.7 35.6,42.7 35.9,43 R40.2
LED1: D6.27 R41.2 | length 11.2
  Top Layer w0.3: D6.27 32.357,38.45 33,39.093 33,41.193 34.007,42.2 37,42.2 37.5,42.7 R41.2
LED2: D6.26 R44.2 | length 13.3
  Top Layer w0.3: D6.26 32.564,37.95 33.5,38.886 33.5,40.986 34.214,41.7 38.6,41.7 39.1,42.2 R44.2
LED3: D6.25 R45.2 | length 15.4
  Top Layer w0.3: D6.25 32.771,37.45 34,38.679 34,40.779 34.421,41.2 35.907,41.2 40.3,41.2 40.7,41.6 R45.2
NetC1_1: C1.1 D1.4 L1.2 R3.1 VT1.3 VT3.2 | length 28.8
  Top Layer w0.3: 19.15,22.35 19.15,24.043 19.607,24.5 23.9,24.5 24.4,24 24.4,15.7 23.3,14.6 20.893,14.6 20.2,13.907 20.2,9.9 21,9.1 22,9.1 22.9,9.1 23.1,9.3 D1.4
NetC1_2: C1.2 D1.2 VD1.2 | length 4.4
  Top Layer w0.3: C1.2 22.3,10.5 22.9,10.5 23.101,10.3 D1.2
  Top Layer w0.5: C1.2 22,12.875 VD1.2
NetC2_1: C2.1 D2.4 L1.1 R4.1 VT2.3 VT4.2 | length 11.7
  Top Layer w0.3: D2.4 29.7,32.2 29.9,32.401 31.799,32.401 32.5,31.7 v1(32.5,25.9)
  Bottom Layer w0.5: v1(32.5,24.1) v1(32.5,25.9)
NetC2_2: C2.2 D2.2 VD2.2 | length 4.5
  Top Layer w0.3: D2.2 29.7,31.2 29.9,31 30.5,31 C2.2
  Top Layer w0.5: VD2.2 30.8,28.625 C2.2
NetC5_1: C5.1 C6.1 C7.1 R21.1 R27.2 X3.1 | length 9.1
  Top Layer w0.5: R27.2 9.1,9.5 9.6,9 9.6,3.4 9.9,3.1 R21.1
NetC8_1: C8.1 C9.1 C10.1 R24.2 R28.2 X4.1 | length 9.7
  Top Layer w0.5: R24.2 42.2,2.5 42.5,2.8 42.5,9.1 42.9,9.5 R28.2
NetC11_2: C11.2 D6.10 R15.1 R17.2 | length 33.3
  Top Layer w0.3: D6.10 25.55,38.45 v1(26,38.9)
  Top Layer w0.5: R15.1 R17.2 C11.2 v1(8.9,47.8)
  Bottom Layer w0.3: v1(8.9,47.8) 8.9,46.4 9.6,45.7 23.5,45.7 24.2,45 24.2,43.9 23.7,43.4 23.7,39.3 24.1,38.9 v1(26,38.9)
NetC12_2: C12.2 D6.12 R16.1 R18.2 | length 43.8
  Top Layer w0.3: D6.12 22.6,37 v1(23,36.6)
  Top Layer w0.5: R16.1 R18.2 C12.2 v1(43.1,47.3)
  Bottom Layer w0.3: v1(23,36.6) 23,37.7 23.4,38.1 26.5,38.1 26.8,38.4 26.8,40.9 27.5,41.6 28.797,41.6 29.199,42.001 29.599,42.001 30.1,41.5 30.1,39.7 30.5,39.3 35.7,39.3 36,39.6 36,42.2 35.6,42.6 33.9,42.6 33.55,42.95 33.55,46.95 33.9,47.3 v1(43.1,47.3)
NetC13_1: C13.1 R29.2 R30.1 | length 2.6
  Top Layer w0.5: R29.2 C13.1 ; C13.1 R30.1
NetC13_2: C13.2 R21.2 R22.1 | length 2.6
  Top Layer w0.5: R21.2 C13.2 R22.1
NetC14_1: C14.1 R31.2 R32.1 | length 2.6
  Top Layer w0.5: R31.2 R32.1
NetC14_2: C14.2 R23.2 R24.1 | length 2.6
  Top Layer w0.5: R23.2 C14.2 R24.1
NetC15_2: C15.2 D6.11 D6.18 R25.2 | length 46.4
  Top Layer w0.3: D6.11 26,37.95 26.55,37.4 D6.18 26.55,34.65 v1(26.9,34.3)
  Top Layer w0.5: R25.2 C15.2 v1(24.5,5)
  Bottom Layer w0.3: v1(24.5,5) 24.5,10.007 25.793,11.3 27.4,11.3 27.8,11.7 27.8,14.379 27.1,15.079 27.1,29.8 26.6,30.3 25.2,30.3 24.4,31.1 24.4,34.012 25.388,35 26.2,35 v1(26.9,34.3)
NetC16_2: C16.2 D6.13 D6.17 R26.1 | length 45.6
  Top Layer w0.3: D6.13 24.05,37.05 24.3,37.3 25.8,37.3 26.05,37.05 D6.17 26.05,34.65 v1(25.7,34.3)
  Top Layer w0.5: v1(28,4.1) C16.2 R26.1
  Bottom Layer w0.3: v1(25.7,34.3) 24.9,33.5 24.9,31.307 25.407,30.8 26.807,30.8 27.6,30.007 27.6,15.286 28.3,14.586 28.3,11.493 27.607,10.8 26,10.8 25,9.8 25,5.5 25.9,4.6 26.596,4.6 27.096,4.1 v1(28,4.1)
NetC25_2: C25.2 C26.2 D6.9 L3.2 | length 15.4
  Top Layer w0.3: D6.9 24.65,38.95 25.3,39.6 26.4,39.6 28.8,37.2 29.8,37.2 30.2,36.8 33,36.8 33.2,36.6 C25.2
  Top Layer w0.5: C25.2 L3.2
NetC28_2: C28.2 D6.7 R42.1 | length 8.2
  Top Layer w0.3: C28.2 R42.1 22.1,36.4 21.9,36.6 21.1,36.6 20.9,36.8 20.9,39.7 21.15,39.95 D6.7
NetC29_2: C29.2 D6.5 Z1.1 | length 13.9
  Top Layer w0.3: D6.5 21.476,40.95 21.3,41.126 21.3,45.393 21.707,45.8 23.9,45.8 24.2,46.1 24.2,48.35 24.5,48.65 Z1.1@25.2,48.65 ; Z1.1 25.75,48.3 26.7,48.3 C29.2
NetC30_2: C30.2 D6.6 Z1.3 | length 9.7
  Top Layer w0.3: D6.6 21.25,40.45 20.8,40.9 20.8,46 C30.2 23,46.7 Z1.3
NetD1_3: D1.3 R1.1 | length 31.6
  Top Layer w0.3: R1.1 18.4,21.2 18.6,21.4 18.6,24.2 19.4,25 24.107,25 24.9,24.207 24.9,15.493 23.507,14.1 21.1,14.1 20.7,13.7 20.7,10.233 21.133,9.8 D1.3
NetD1_6: D1.6 R9.2 | length 1.9
  Top Layer w0.3: D1.6 29.601,8.8 29.8,8.6 30.2,8.6 R9.2
NetD1_7: D1.7 D6.30 R8.2 | length 40.3
  Top Layer w0.3: v1(27.3,8.8) 27.8,9.3 D1.7 29.6,9.3 29.8,9.5 30.2,9.5 R8.2 ; v1(28.5,39.2) 29.2,39.2 29.95,39.95 D6.30
  Bottom Layer w0.3: v1(27.3,8.8) 27.8,9.3 29.407,9.3 30.4,10.293 30.4,13.7 29.5,14.6 29.5,37.6 29.7,37.8 29.7,38.8 29.3,39.2 v1(28.5,39.2)
NetD1_8: D1.8 D6.29 R7.2 | length 40.4
  Top Layer w0.3: v1(26.3,8.8) 27.3,9.8 D1.8 29.393,9.8 29.6,10.007 29.6,10.8 29.8,11 R7.2 ; v1(29,38.3) 29.007,38.3 30.157,39.45 D6.29
  Bottom Layer w0.3: v1(26.3,8.8) 27.3,9.8 29.2,9.8 29.9,10.5 29.9,13.493 29,14.393 v1(29,38.3)
NetD1_10: D1.10 R5.1 | length 14.6
  Top Layer w0.3: R5.1 19,8.3 19.5,7.8 24.9,7.8 25.4,8.3 25.4,10.1 26.1,10.8 D1.10
NetD2_3: D2.3 R2.2 | length 23.3
  Top Layer w0.3: D2.3 31.6,31.7 32,31.3 32,26.4 31.8,26.2 31.8,25.5 32.2,25.1 40.6,25.1 41.1,24.6 41.1,21.4 40.8,21.1 R2.2
NetD2_6: D2.6 R10.2 | length 2.1
  Top Layer w0.3: R10.2 22.2,32.9 22.9,32.9 23.1,32.7 D2.6
NetD2_7: D2.7 D6.32 R11.2 | length 17.5
  Top Layer w0.3: R11.2 22.354,31.954 22.746,31.954 22.993,32.2 D2.7 25.3,32.2 v1(25.8,32.7) ; v1(29.2,41) 29.25,40.95 D6.32
  Bottom Layer w0.3: v1(25.8,32.7) 27.1,32.7 27.6,33.2 27.6,34.01 27.6,37.593 27.3,37.893 27.3,40.6 27.7,41 v1(29.2,41)
NetD2_8: D2.8 D6.31 R12.2 | length 18.1
  Top Layer w0.3: R12.2 22.824,30.4 23,30.576 23,31.5 23.2,31.7 D2.8 v1@26.2,31.7 ; v1(28.3,40.1) 29.29,40.1 29.64,40.45 D6.31
  Bottom Layer w0.3: v1(26.2,31.7) 26.308,31.7 26.808,32.2 27.307,32.2 28.1,32.993 28.1,37.8 27.8,38.1 27.8,39.7 28.3,40.2 v1(28.3,40.1)
NetD2_10: D2.10 R6.2 | length 3
  Top Layer w0.3: R6.2 23,29.6 23.2,29.8 23.8,29.8 24.051,30.051 D2.10
NetD3_1: D3.1 R25.1 R33.2 | length 2.9
  Top Layer w0.5: D3.1 20.325,2.675 21.875,2.675 R33.2 R25.1
NetD3_3: D3.3 R19.1 R22.2 | length 6.1
  Top Layer w0.5: R19.1 R22.2 16.275,3.275 16.775,3.275 17.1,3.6 18.3,3.6 19.25,4.55 D3.3
NetD3_4: D3.4 R30.2 R33.1 | length 7.6
  Top Layer w0.5: R30.2 16.125,4.525 17.675,4.525 D3.4 17.7,5.1 18,5.4 21.5,5.4 21.9,5 R33.1
NetD4_1: D4.1 R26.2 R34.1 | length 3.1
  Top Layer w0.5: R26.2 D4.1
NetD4_3: D4.3 R20.1 R23.1 | length 3.4
  Top Layer w0.5: D4.3 34.35,2.05 34.4,2.1 35,2.1 35.225,2.325 35.825,2.325 R23.1 R20.1
NetD4_4: D4.4 R31.1 R34.2 | length 6.6
  Top Layer w0.5: R34.2 34.1,3.2 34.35,3.45 D4.4@34.35,4.15 ; D4.4 D4.4@34.35,4.15 ; R31.1 35.3,3.9 35.1,4.1 34.4,4.1 D4.4@34.35,4.15
NetD5_1: D5.1 L2.1 VD3.1 | length 7.5
  Top Layer w0.6: VD3.1 11.925,36.9 12.525,37.5 L2.1 13.701,37.199 D5.1
NetD5_3: D5.3 R38.2 R39.2 | length 3.2
  Top Layer w0.3: D5.3 18.7,37.05 18.7,35.8 R38.2
  Top Layer w0.5: D5.3 R39.2@20,37.2
NetD5_4: D5.4 R35.1 | length 1.7
  Top Layer w0.4: R35.1 18.5,41.2 18.5,39.85 D5.4
NetD6_34: D6.34 X5.2 | length 21.2
  Top Layer w0.3: v1(26,41.4) 28.61,41.4 28.935,41.725 29.855,41.725 30.08,41.95 D6.34
  Top Layer w0.5: X5.2 v1(16.8,46.5)
  Bottom Layer w0.3: v1(16.8,46.5) 17.6,47.3 24.593,47.3 25.3,46.593 25.3,42.2 26,41.5 v1(26,41.4)
NetD6_37: D6.37 X5.3 | length 20.6
  Top Layer w0.3: v1(28.378,42.922) 28.4,42.9 29.2,42.9 29.55,43.25 D6.37
  Top Layer w0.5: X5.3 v1(15.55,46.5)
  Bottom Layer w0.3: v1(15.55,46.5) 16.85,47.8 24.8,47.8 25.8,46.8 25.8,44.6 26.6,43.8 27.5,43.8 v1(28.378,42.922)
NetD6_44: D6.44 R43.2 | length 4.2
  Top Layer w0.3: D6.44 26.05,45.65 26.3,45.9 28,45.9 28.2,46.1 R43.2
NetD7_3: D7.3 R46.1 | length 4.4
  Top Layer w0.4: R46.1 35.1,37.134 35.334,36.9 37.8,36.9 38,37.1 D7.3
NetR1_2: R1.2 R3.2 VT1.1 | length 3
  Top Layer w0.5: R3.2@15.9,22.6 R1.2 17.45,22.65 VT1.1
NetR2_1: R2.1 R4.2 VT2.1 | length 3.2
  Top Layer w0.5: VT2.1 38.45,22.55 R4.2 R2.1
NetR5_2: R5.2 R13.2 VT3.1 | length 3.1
  Top Layer w0.5: VT3.1 17.45,12.15 R13.2 R5.2
NetR6_1: R6.1 R14.2 VT4.1 | length 30.4
  Top Layer w0.3: R6.1 21.6,27.4 21.9,27.1 27.6,27.1 28,26.7 28,19.8 28.8,19 28.8,15.3 29.6,14.5 R14.2 31.9,14.6 38.274,14.6 38.45,14.424 VT4.1
NetR36_1: R36.1 VD4.1 | length 1.6
  Top Layer w0.5: R36.1 VD4.1
NetR37_1: R37.1 VD5.1 | length 1.6
  Top Layer w0.5: R37.1 VD5.1
NetR40_1: R40.1 VD6.1 | length 1.6
  Top Layer w0.5: R40.1 VD6.1
NetR41_1: R41.1 VD7.1 | length 1.6
  Top Layer w0.5: R41.1 VD7.1
NetR44_1: R44.1 VD8.1 | length 1.6
  Top Layer w0.5: R44.1 VD8.1
NetR45_1: R45.1 VD9.1 | length 1.6
  Top Layer w0.5: R45.1 VD9.1
UART1-TX: D6.42 X5.4 | length 25
  Top Layer w0.3: v1(27.05,42.8) D6.42
  Top Layer w0.5: X5.4 v1(14.3,46.5)
  Bottom Layer w0.3: v1(14.3,46.5) 16.1,48.3 25.007,48.3 26.3,47.007 26.3,44.807 26.807,44.3 27.99,44.3 29.1,43.19 29.1,42.61 28.69,42.2 27.6,42.2 27.05,42.75 v1(27.05,42.8)
pads on no net: D1. D1.5 D2. D2.5 D3. D4. D5. D6. D6.2 D6.3 D6.4 D6.14 D6.15 D6.16 D6.19 D6.20 D6.21 D6.22 D6.33 D6.38 D6.39 D6.40 D6.41 D6.43 D6.45 D6.46 D7. D7.4 VT1. VT2. VT3. VT4. X5. X5.0

## Polygon pours and split planes (outlines as drawn)
GND on MID1 "GND-MID" (solid, pour order 1): 0,6 6,6 6,0 46,0 46,6 52,6 52,44 46,44 46,50 6,50 6,44 0,44
GND on MID2 "GND-MID" (solid, pour order 2): 0,6 6,6 6,0 46,0 46,6 52,6 52,44 46,44 46,50 6,50 6,44 0,44

## Other copper
Top Layer:
  region net NetC8_1: 43.6,11.4 43,12 41.5,12 41,12.5 41,20 41.7,20.7 41.7,26.6 42.1,27 51.1,27 51.6,26.5 51.6,6.6 51,6 44,6 43.6,6.4
  region net +VOUT: 33,32.5 33.5,33 41,33 41.5,33.5 41.5,41.5 42,42 50.7,42 51.6,41.1 51.6,27.9 51.2,27.5 41,27.5 40.5,27 40.5,26.2 40.05,25.75 33.55,25.75 33,26.3
  region net NetC2_1: 37.4,24.6 37.4,21.8 37.7,21.5 38.9,21.5 38.9,20.4 40.5,18.8 40.5,15.7 40,15.2 30,15.2 29.5,15.7 29.5,24.1 30,24.6
  region net GND: 40,7.8 40,12 39.5,12.5 38,12.5 37.5,13 37.5,14.1 33.4,14.1 33,13.7 33,10 33.5,9.5 35.6,9.5 36,9.1 36,8.2 36.4,7.8
  pour cut-out: 46,44 52,44 52,50 46,50
  pour cut-out: 46,0 52,0 52,6 46,6
  pour cut-out: 0,0 6,0 6,6 0,6
  pour cut-out: 0,44 6,44 6,50 0,50
  region net +VIN: 11.5,25.5 11,26 11,27.1 10.6,27.5 0.7,27.5 0.3,27.9 0.3,42.1 0.7,42.5 10,42.5 10.5,42 10.5,33.5 11,33 18,33 19,32 19,26 18.5,25.5
  region net NetC1_1: 16.2,20.4 16.5,20.1 18.7,20.1 19,20.4 19,23.5 22.5,23.5 22.5,15.9 21.6,15 12.5,15 12,15.5 12,24 12.6,24.6 16.4,24.6 16.4,23.4 15.1,23.4 14.9,23.2 14.9,21.8 15.1,21.6 16.2,21.6
  region net GND: 12,13.9 12.3,14.2 16.4,14.2 16.4,8.3 15.9,7.8 12,7.8
  region net NetC5_1: 8.4,6.4 8,6 0.8,6 0.3,6.5 0.3,25.5 0.6,25.8 10.2,25.8 11,25 11,12.5 10.5,12 8.9,12 8.4,11.5
Bottom Layer:
  pour cut-out: 0,50 0,44 6,44 6,50
  pour cut-out: 46,50 46,44 52,44 52,50
  pour cut-out: 46,0 46,6 52,6 52,0
  pour cut-out: 0,0 0,6 6,6 6,0

## Silkscreen, mask and mechanical layers (free items; w line width, h text height)
Top Overlay:
  lines w0.2: 19,31.3 19.6,31.4 ; 19.4,29.7 18.7,29.7 18.7,30.7 19.6,31.4 ; 19.4,30.8 19.6,31.4
  text "DEBUG" at 7.3,48.8 h1.5
  text "+VIN" at 0.7,42.8 h1.5
  text "+VOUT" at 48.3,42.3 h1.5
  text "VIN" at 33.4,40.4 h1.5 r90
  text "VOUT" at 35,40.4 h1.5 r90
  text "EN" at 36.6,40.4 h1.5 r90
  text "OCP" at 38.2,40.4 h1.5 r90
  text "OVP" at 39.8,40.4 h1.5 r90
  text "TEMP" at 41.4,40.4 h1.5 r90
  text "-VIN" at 0.7,10.9 h1.5
  text "-VOUT" at 48.3,10.9 h1.5
  text "HW: 1.0" at 47.9,7.6 h1.5
  text "26.05.2020" at 46.4,6 h1.5
Border:
  the board outline again, w0.2

## Dimensions
0,0 to -0.084,49.972 on Size
0,50 to 52,50 on Size